# Altium PCB LimeSDR-Mini_2v5_Rounded.PcbDoc (part 1 of 7)
Units mm, origin at the board's own origin, x right, y up, seen from the top; angles counter-clockwise.
Board outline 69 x 31.37 mm, 8 copper layers (Top, L2, L3, L4, L5, L6, L7, Bottom), stack 1.555 mm thick; 439 components, 294 nets, 1986 pads, 831 vias.
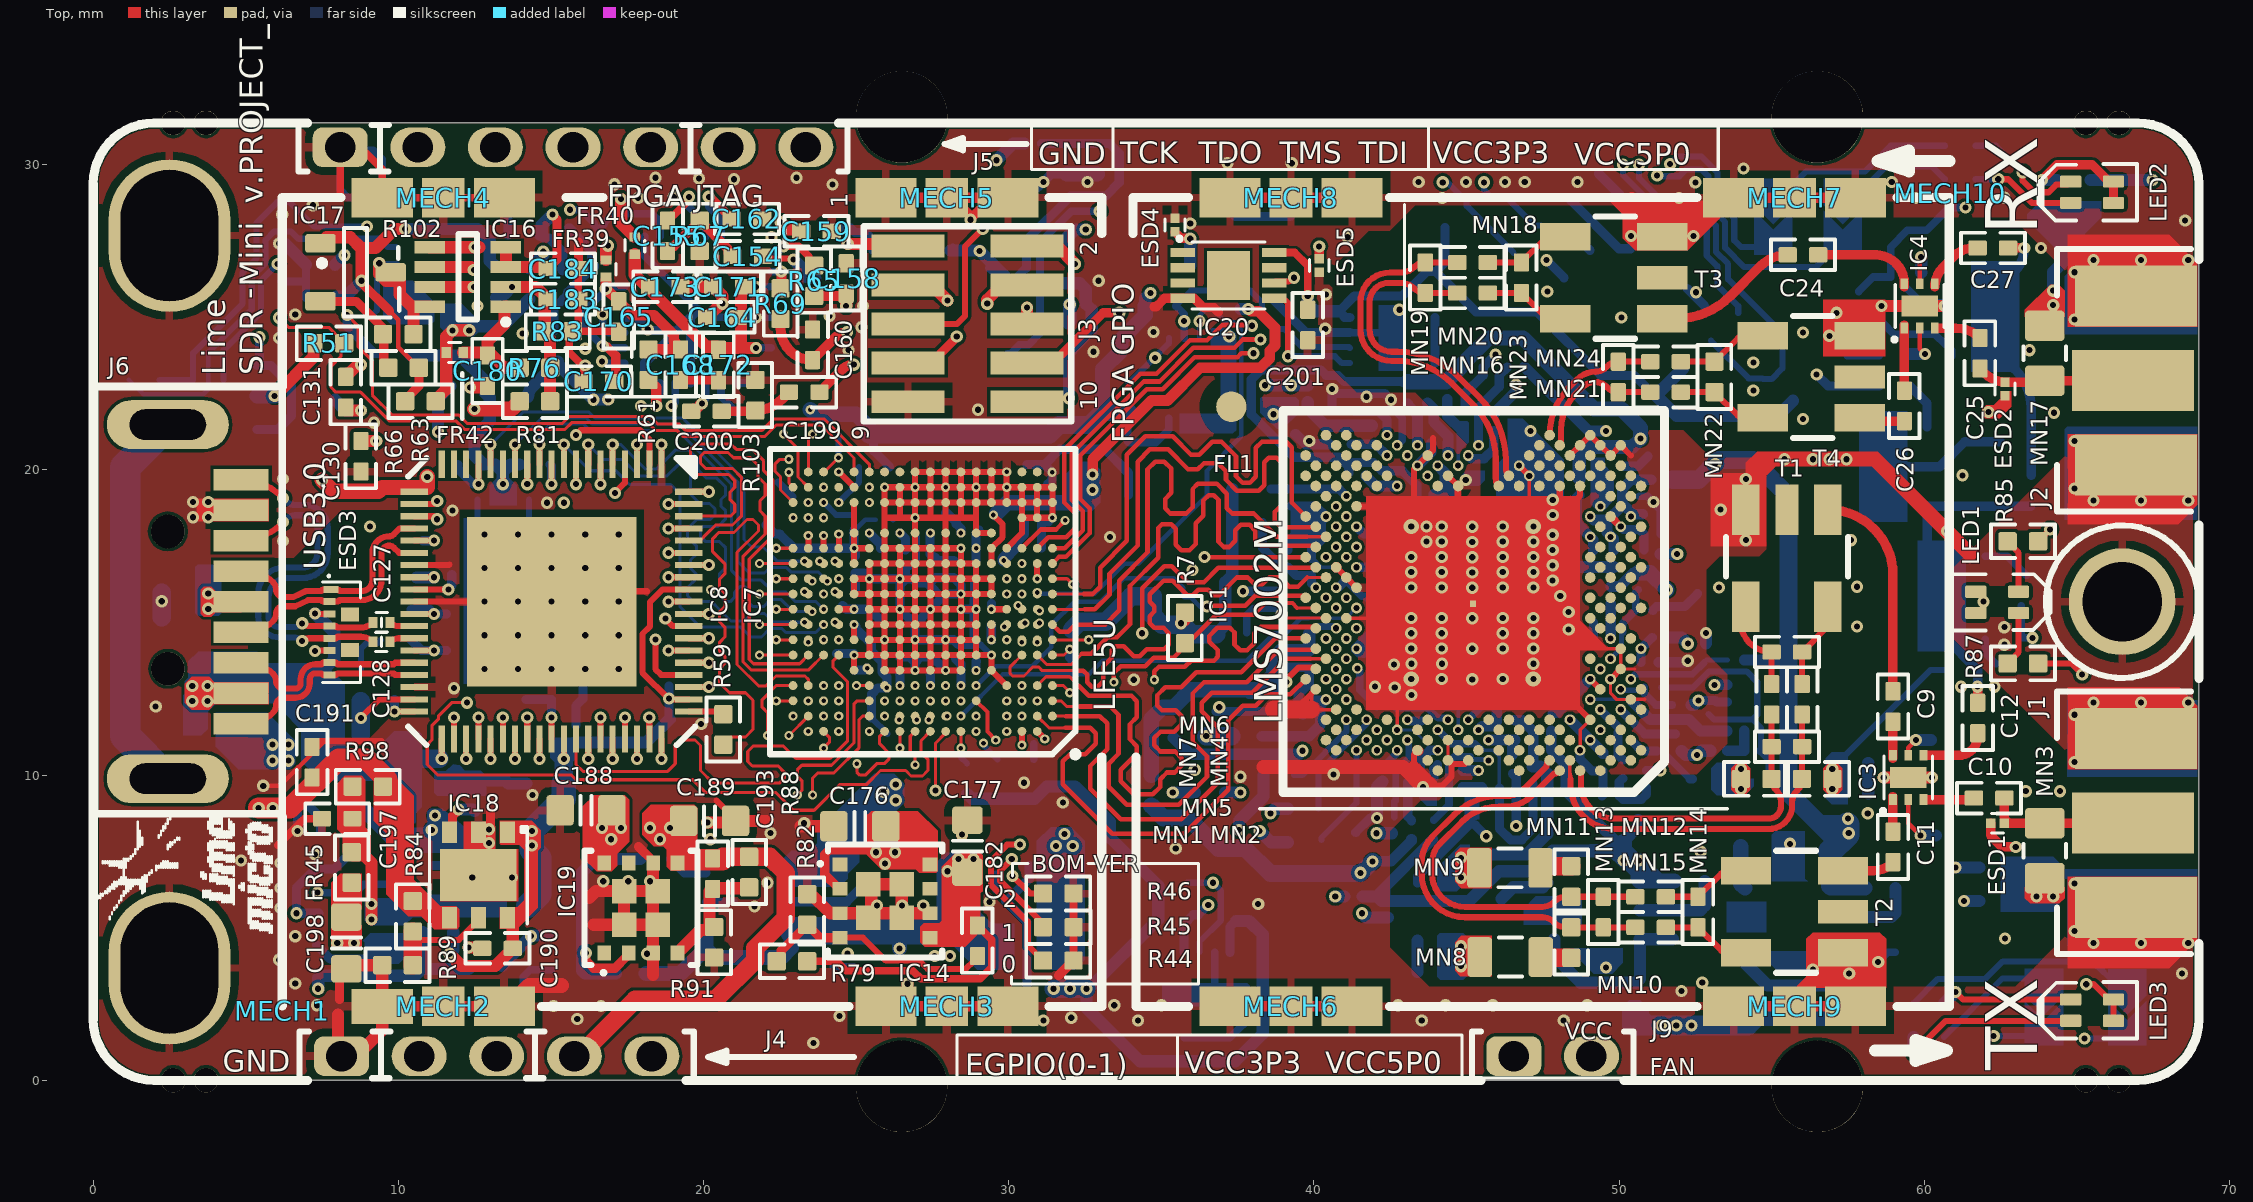
[diagram p0: Top view]
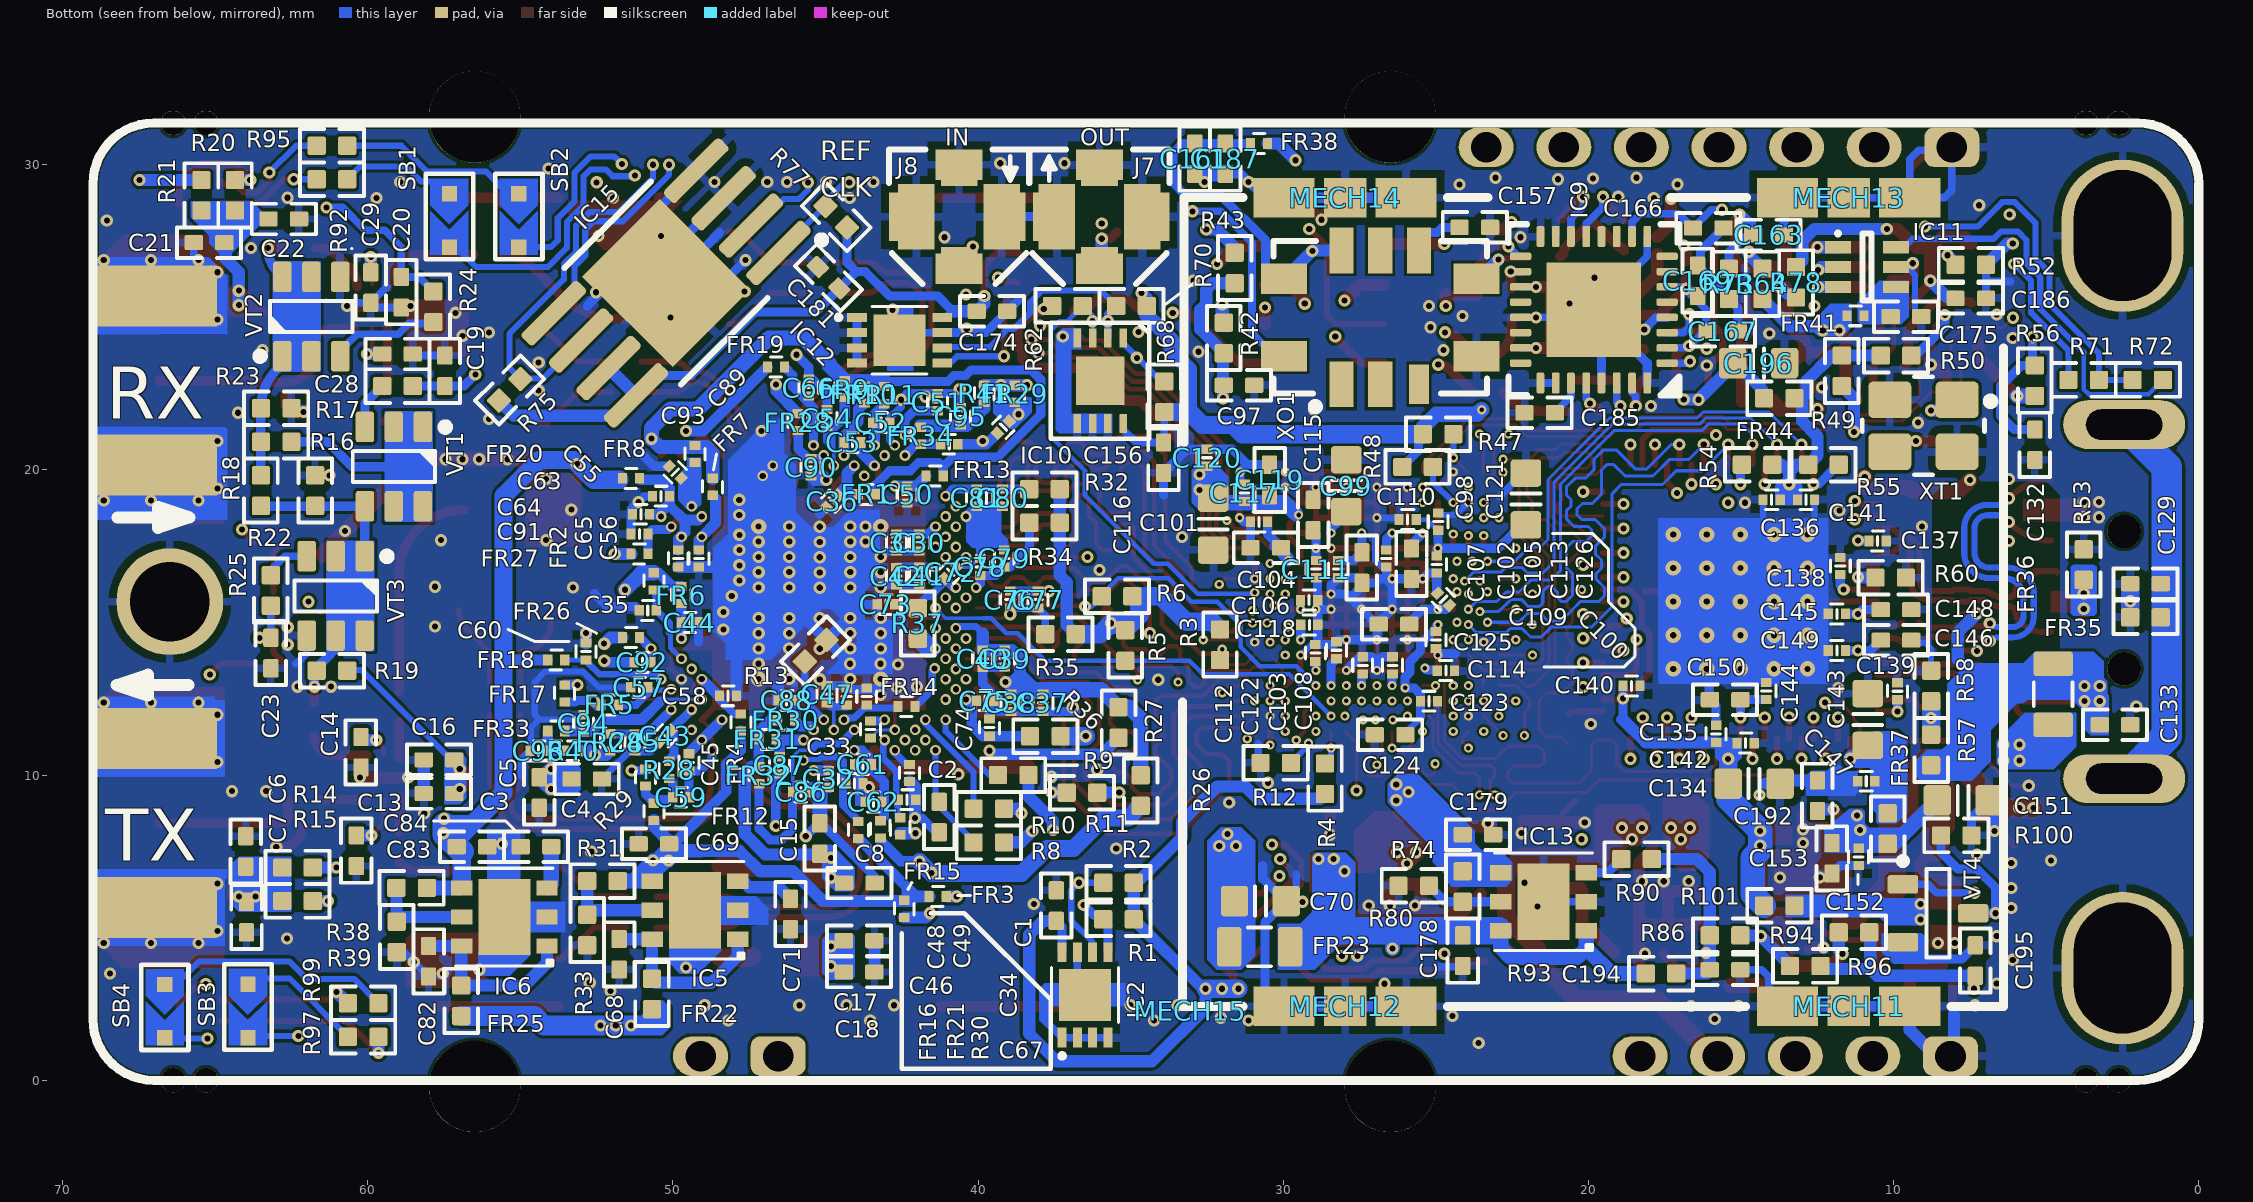
[diagram p1: Bottom view, seen from below]
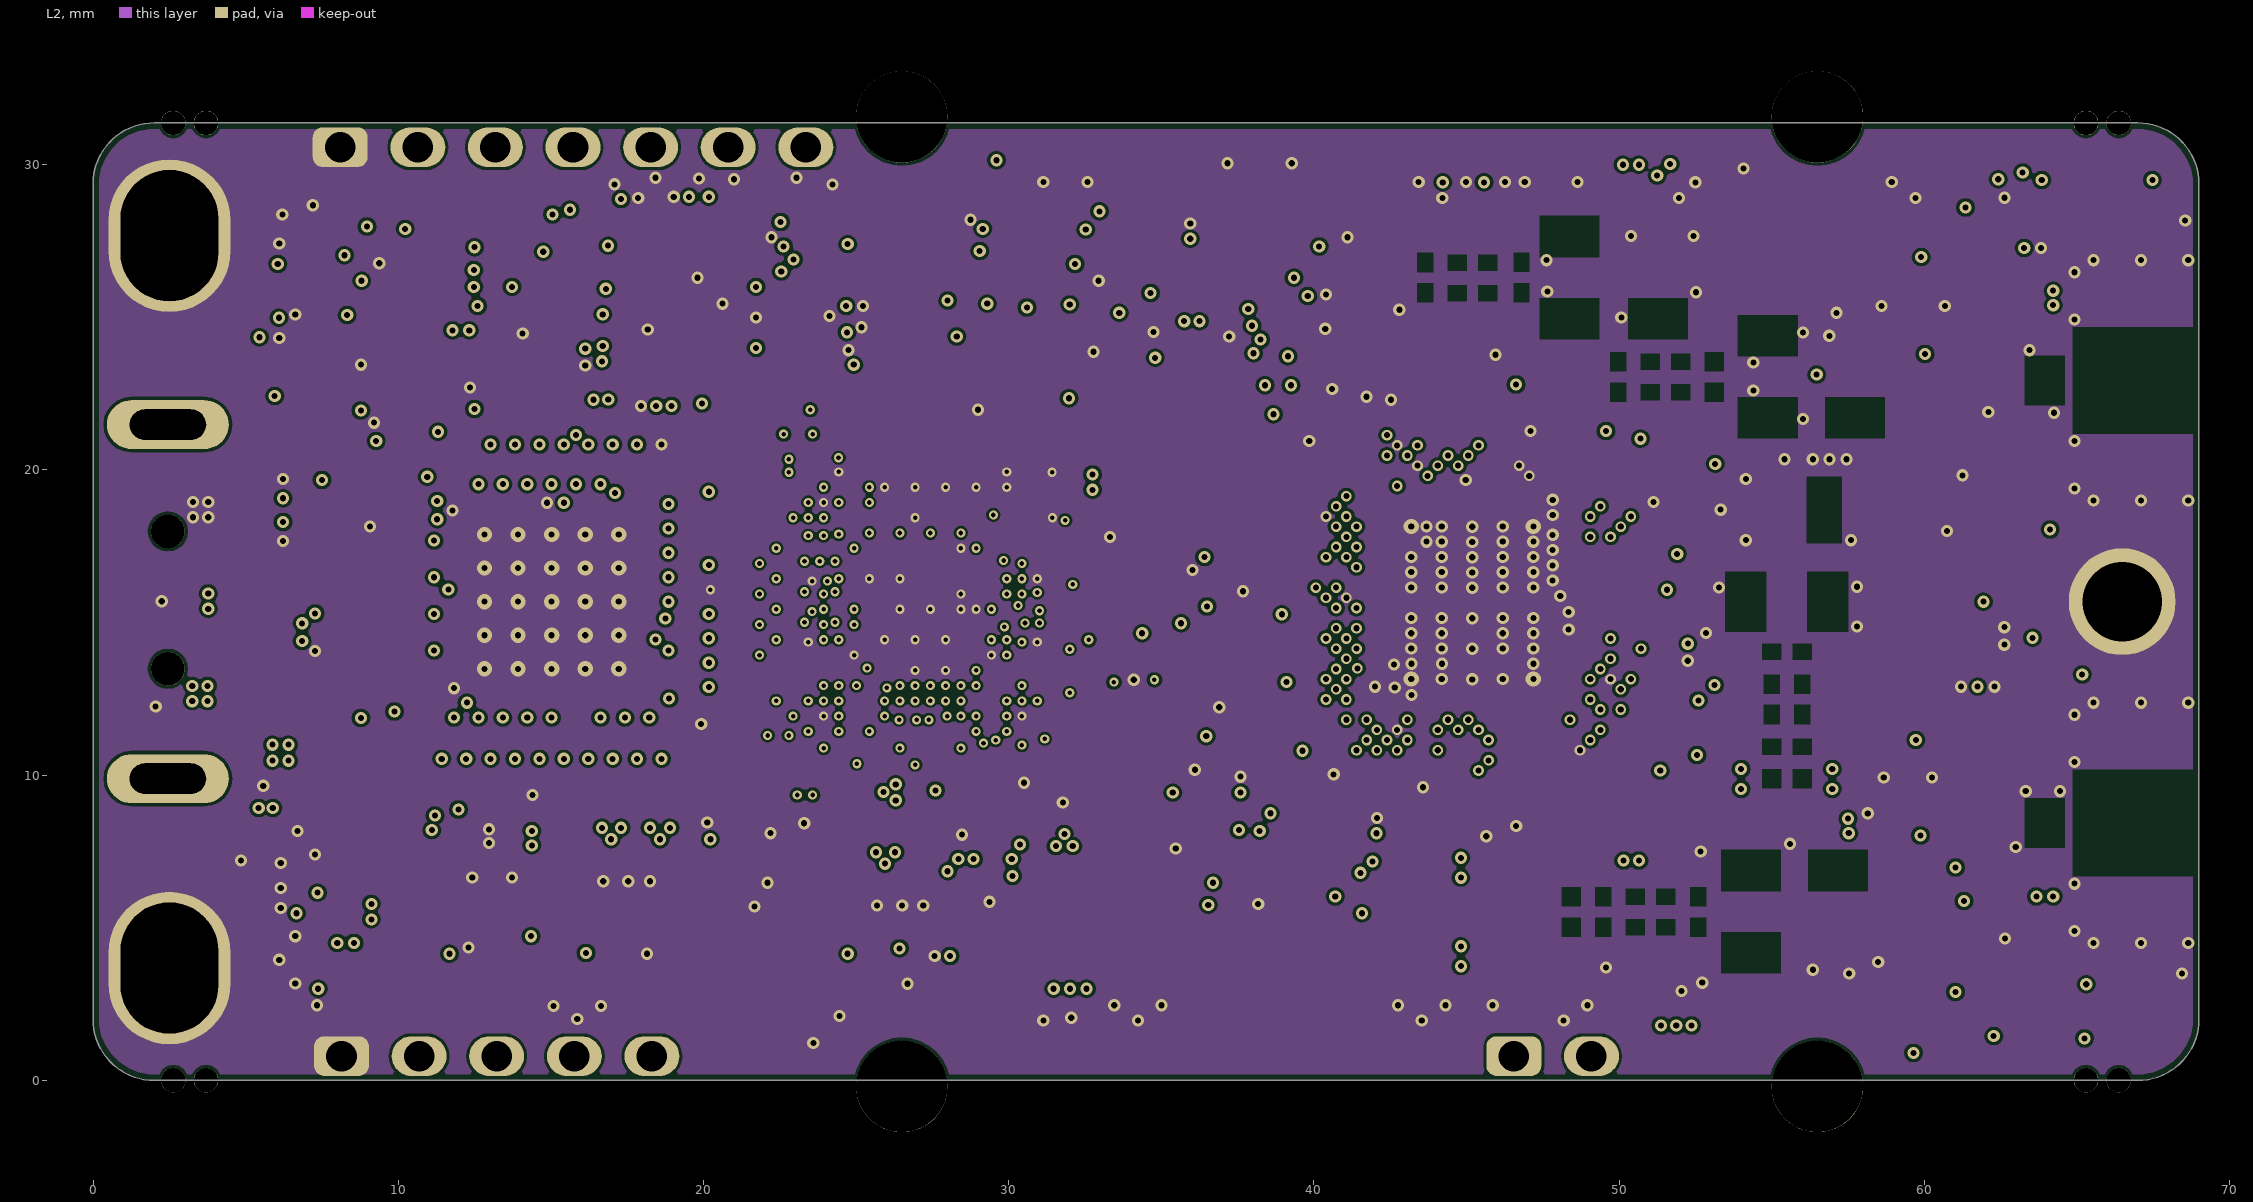
[diagram p2: L2]
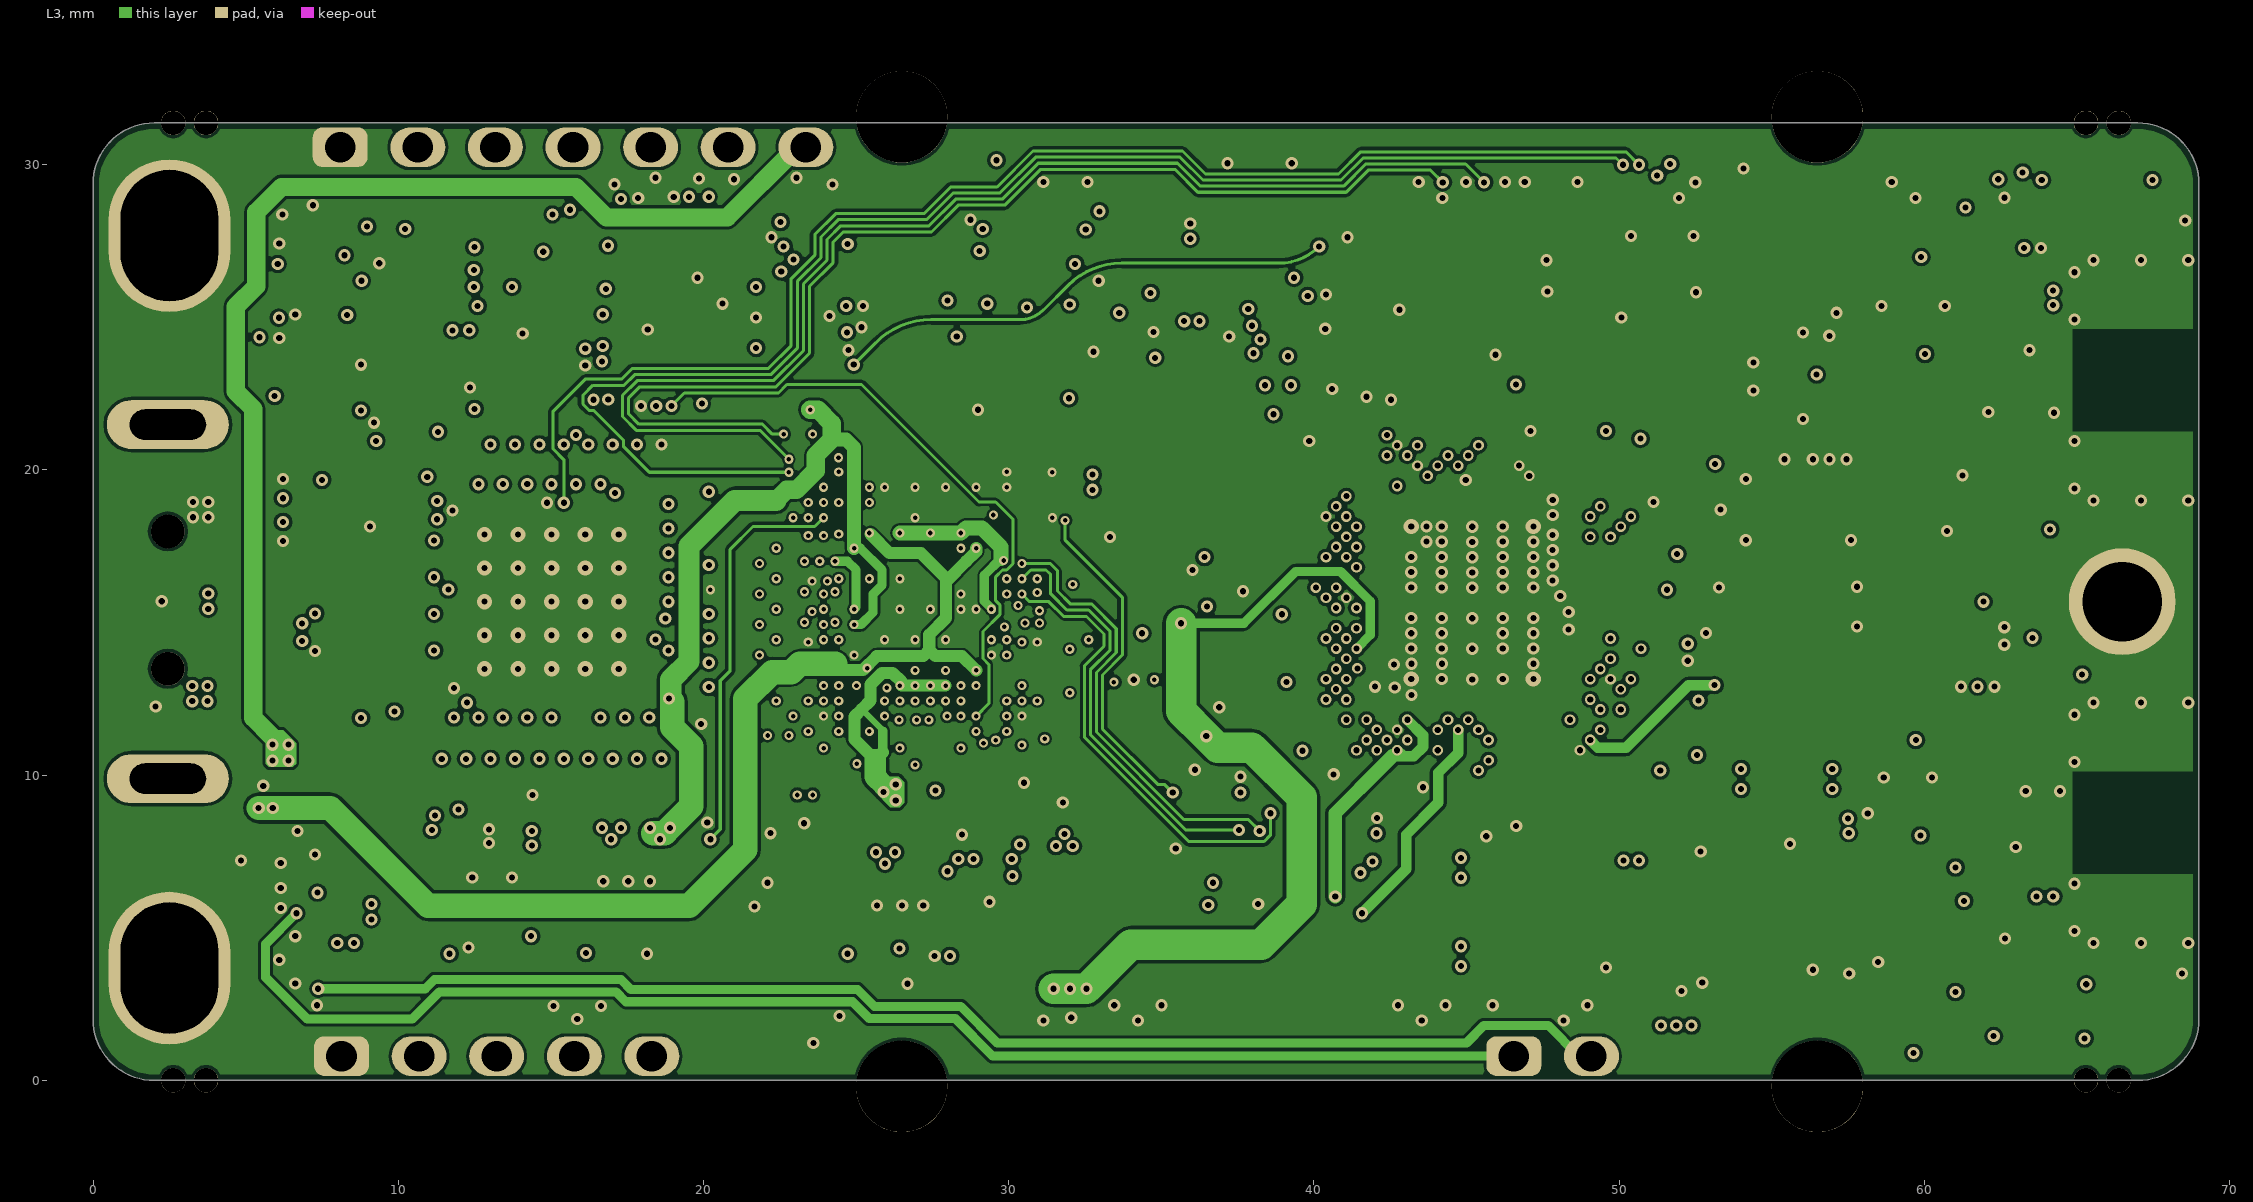
[diagram p3: L3]
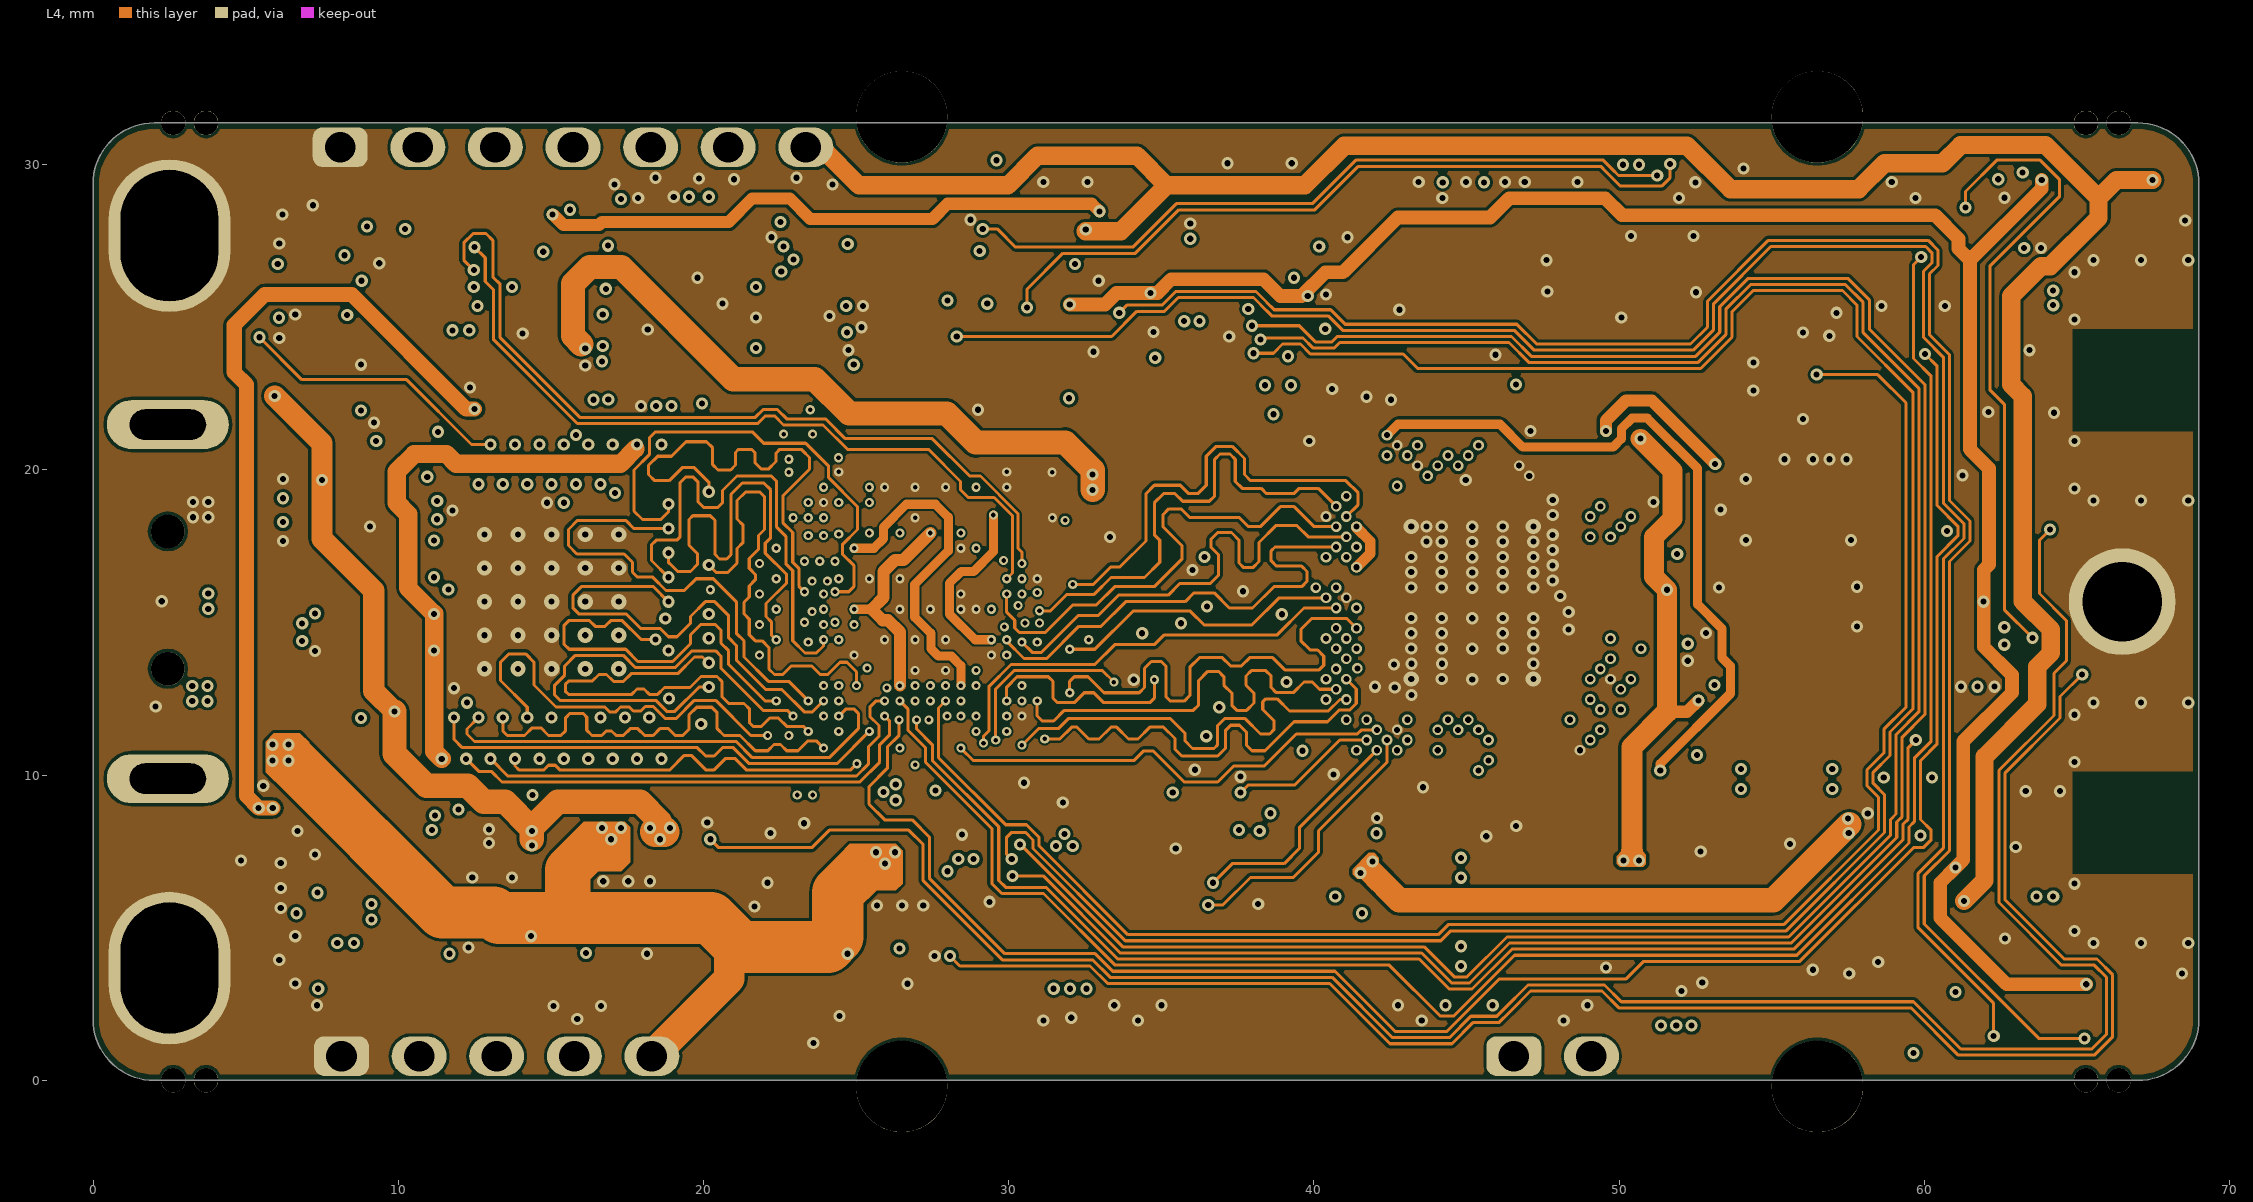
[diagram p4: L4]
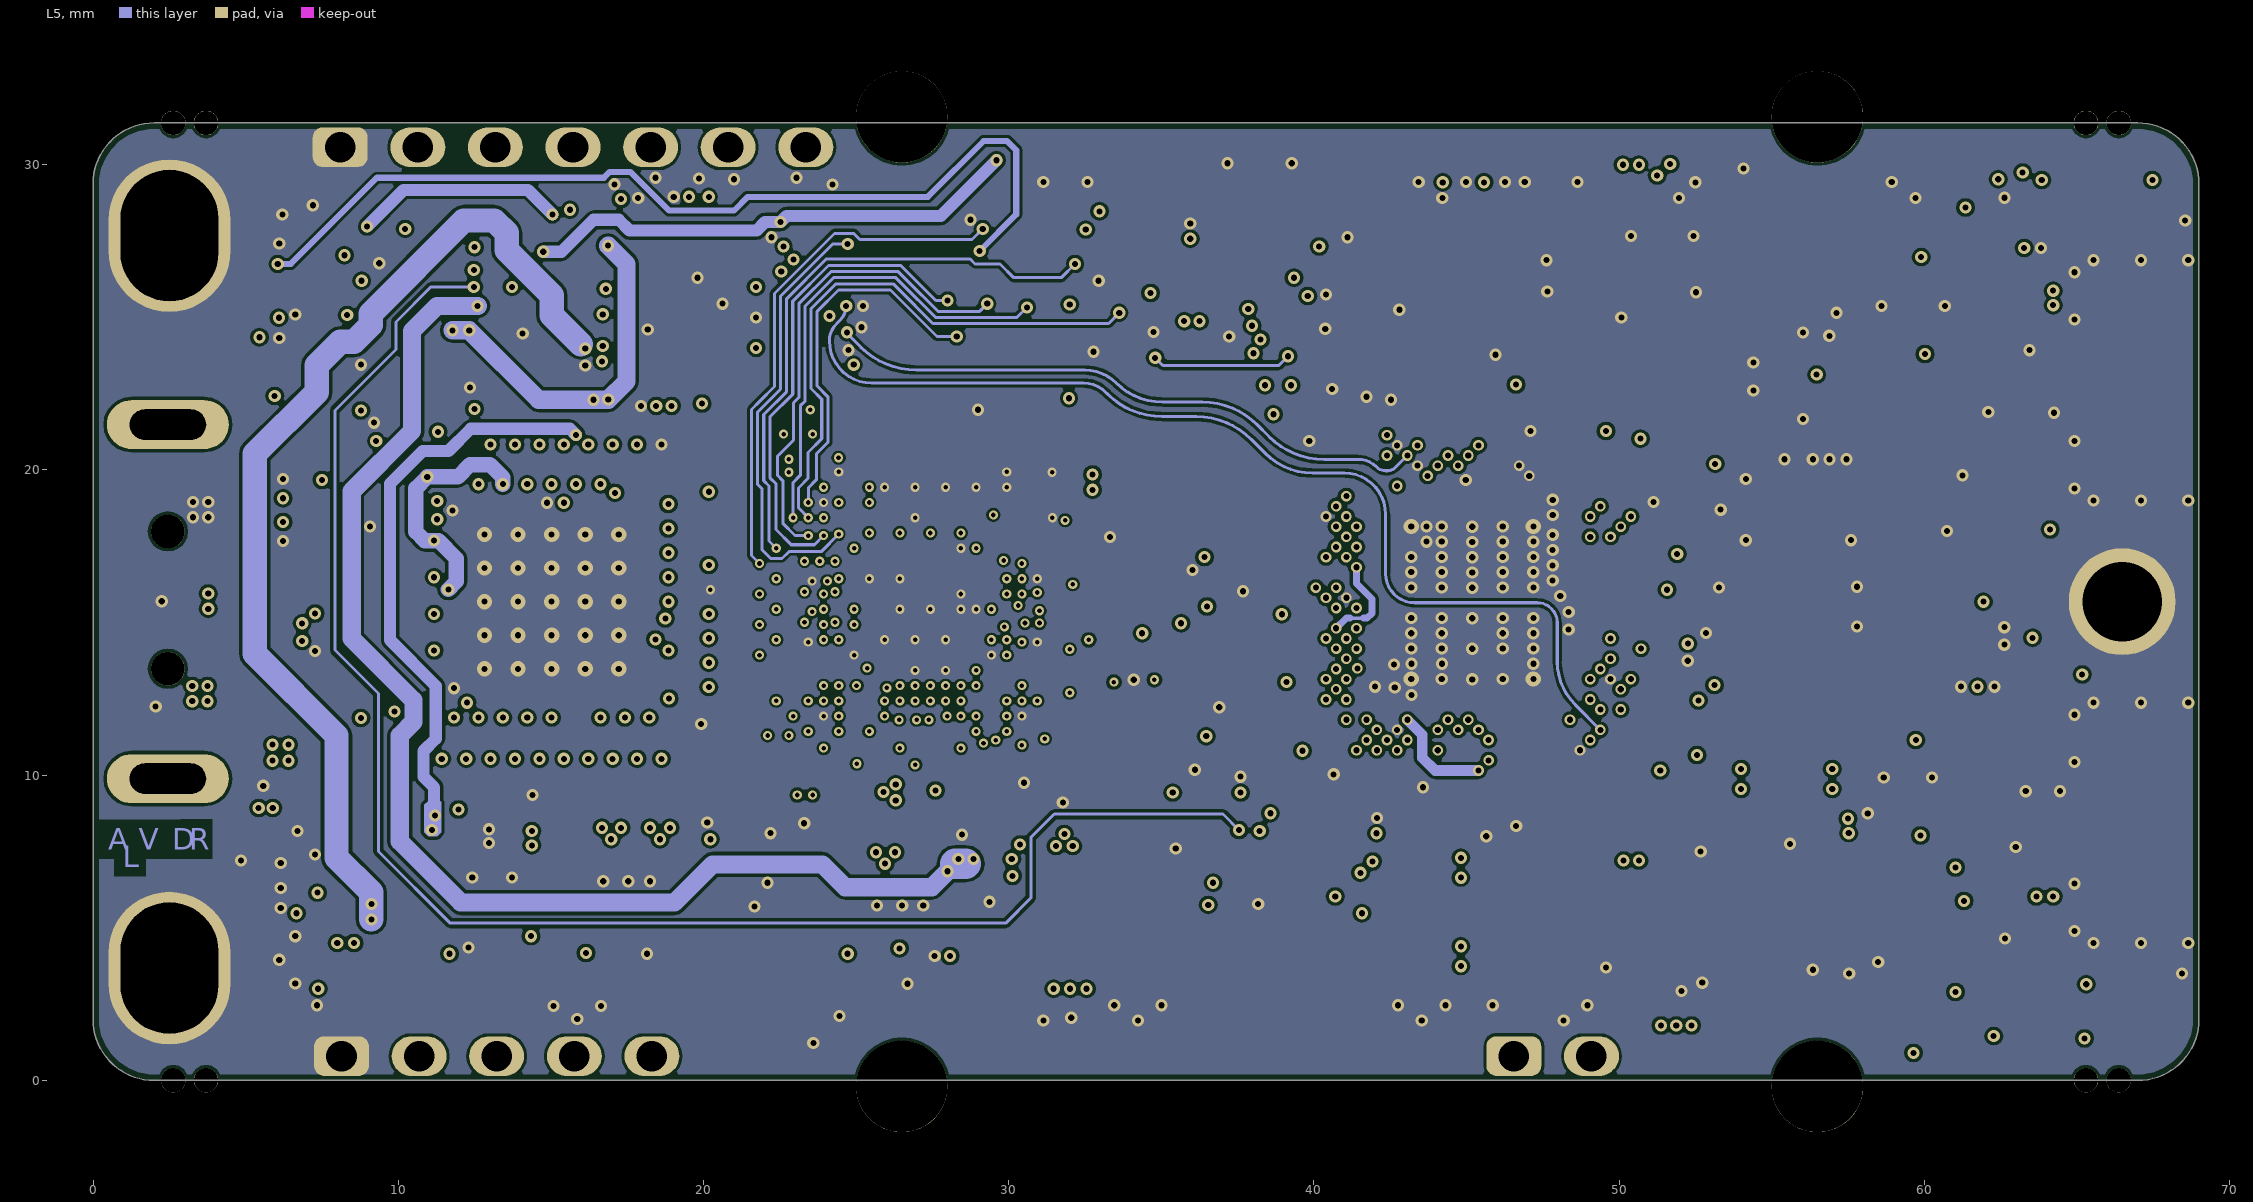
[diagram p5: L5]
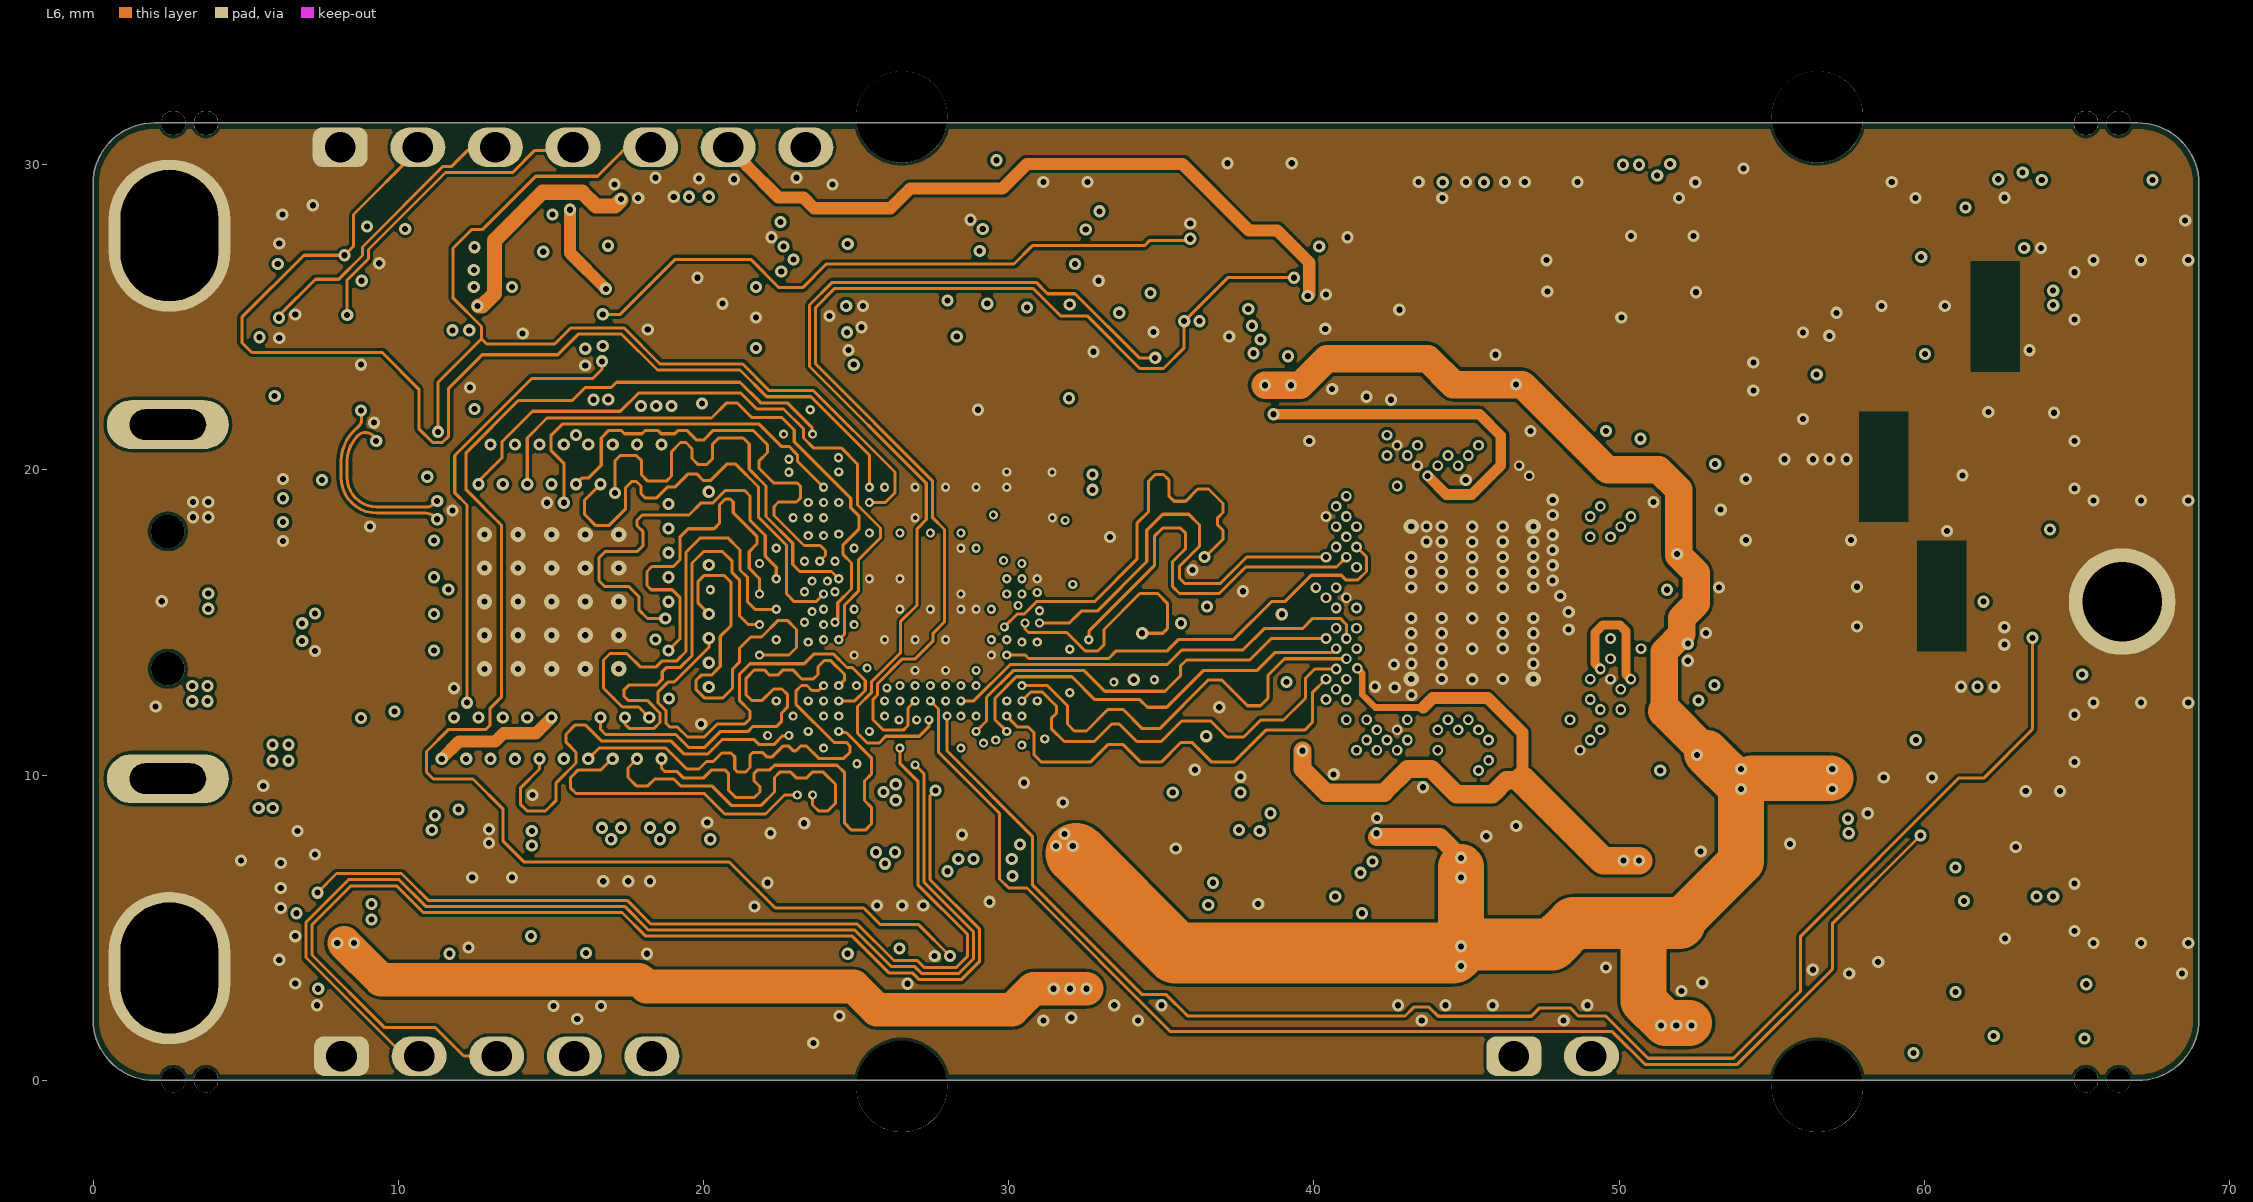
[diagram p6: L6]
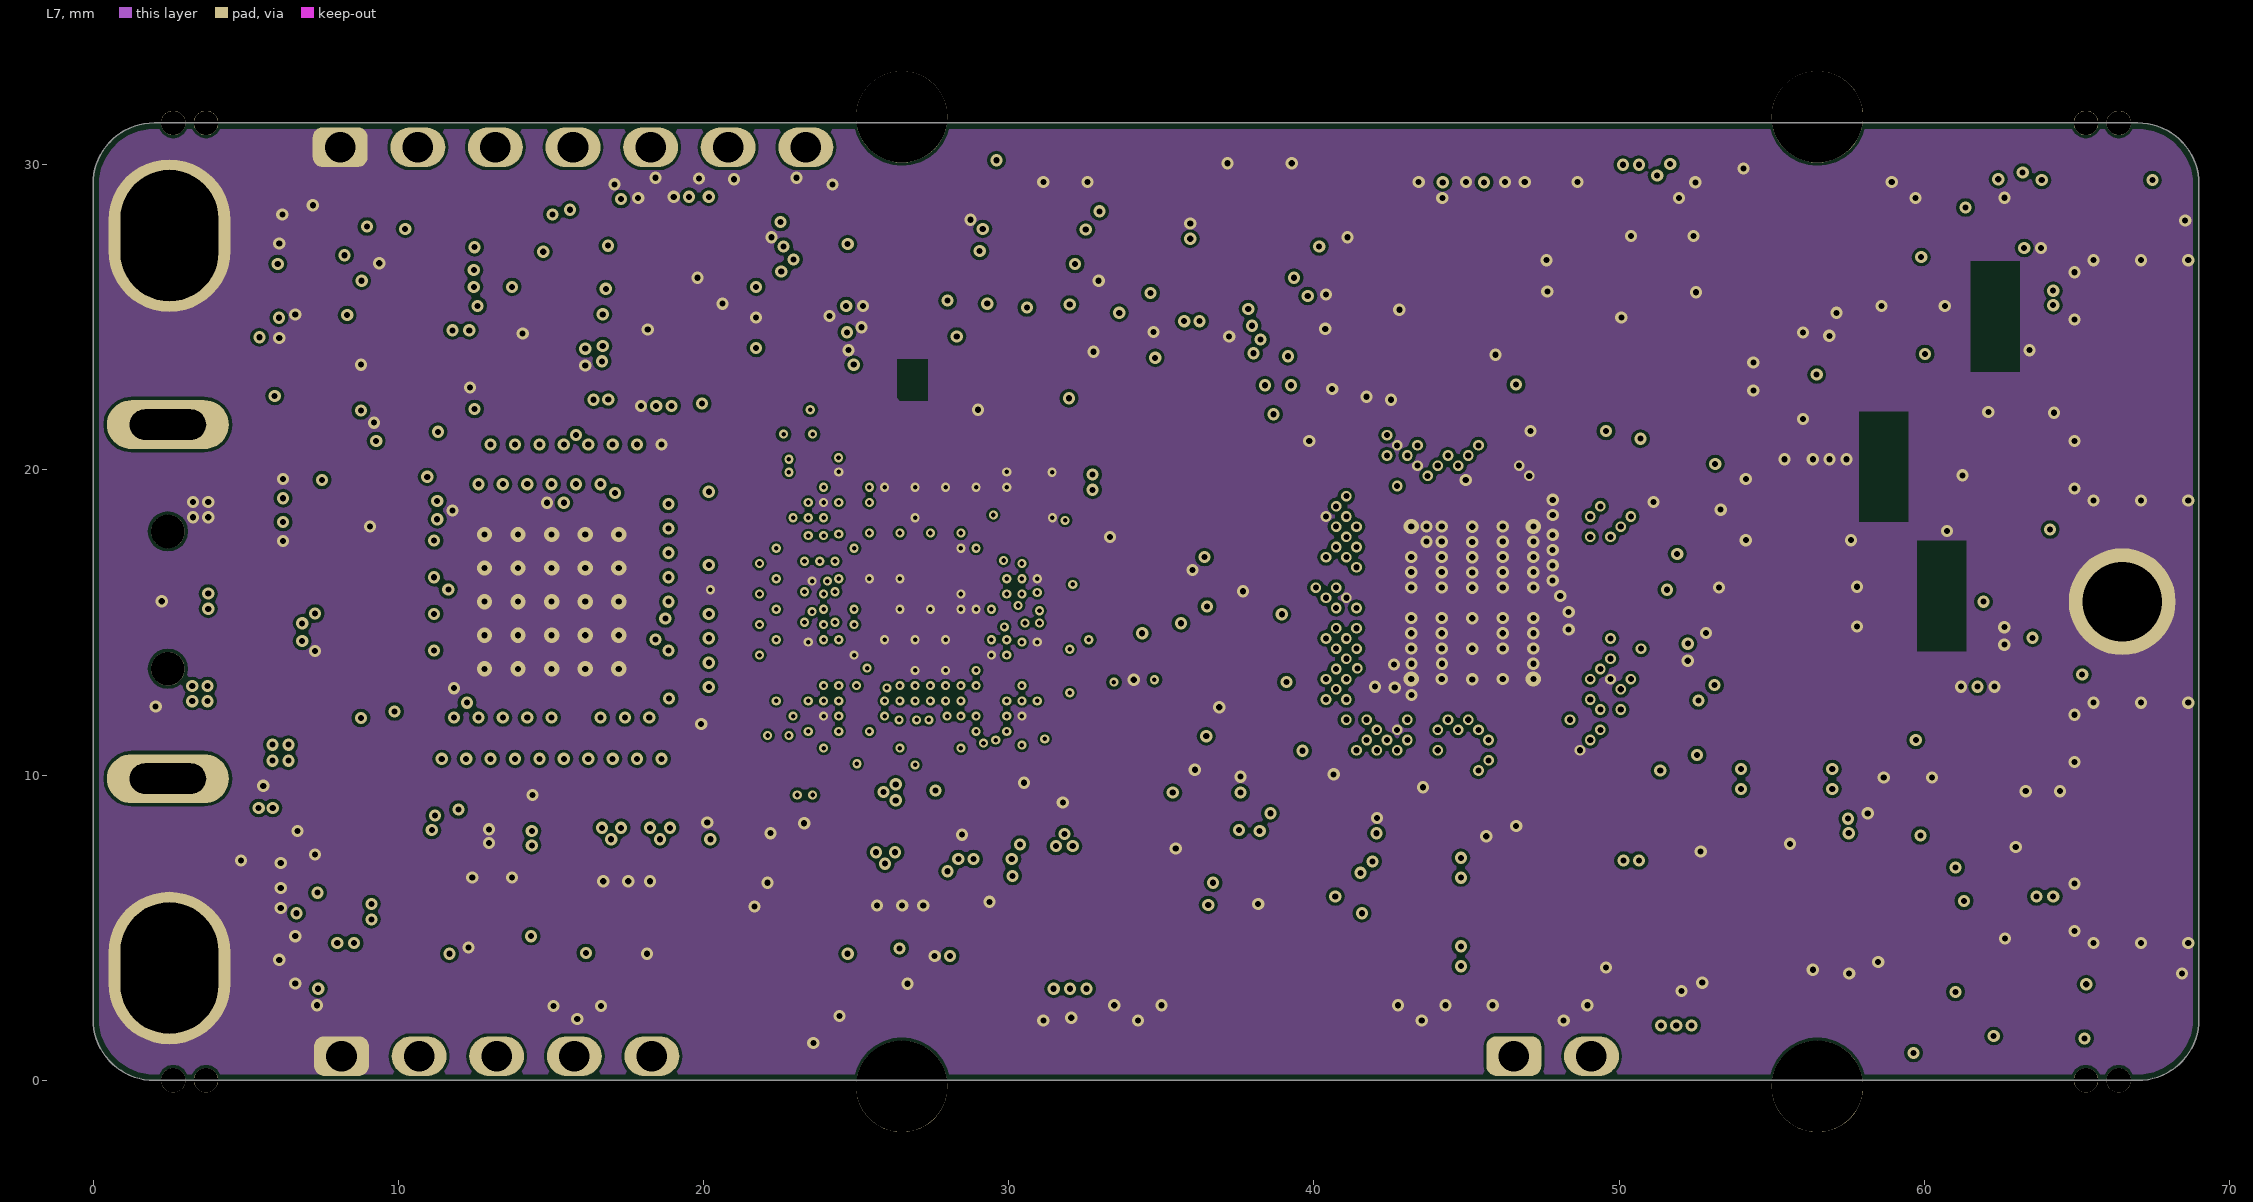
[diagram p7: L7]

## Layer stack, top to bottom
TopSolder: solder mask 0.0102, Solder Resist, Dk 3.5
Top: signal copper 0.0178
Dielectric1: core 0.17, FR-4, Dk 4.8
L2: signal copper 0.0356
Dielectric2: prepreg 0.3, FR-4, Dk 4.2
L3: signal copper 0.03
Dielectric3: core 0.2, FR-4, Dk 4.2
L4: signal copper 0.034
Dielectric 4: prepreg 0.2, Dk 4.2
L5: signal copper 0.03
Dielectric 10: core 0.09, Dk 4.2
L6: signal copper 0.03
Dielectric 11: prepreg 0.2, Dk 4.2
L7: signal copper 0.03
Dielectric 8: core 0.17, Dk 4.2
Bottom: signal copper 0.0178
BottomSolder: solder mask 0.0102, Solder Resist, Dk 3.5

## Board outline
0,2 0,29.37 cw(c2,29.37) 2,31.37 67,31.37 cw(c67,29.37) 69,29.37 69,2 cw(c67,2) 67,0 2,0 cw(c2,2)

## Design rules (kind name [scope] priority, off if disabled: settings)
BoardOutlineClearance [All] p1: gap=0.2 ignorepadtopadclearanceinfootprint=FALSE
Clearance Clearance_FPGA_fanout [WithinRoom('FPGA_fanout')] p1: gap=0.076 ignorepadtopadclearanceinfootprint=FALSE
Clearance [All] p2: gap=0.1 ignorepadtopadclearanceinfootprint=FALSE
ComponentClearance ComponentClearance_LNA_BYP [InComponent('R28') or InComponent('C22') or InComponent('R29') or InComponent('C20') vs InComponent('R28') or InComponent('C22') or InComponent('R29') or InComponent('C20')] p1: gap=-1 collisioncheckmode=3 verticalgap=2540 showdistances=FALSE
ComponentClearance ComponentClearance_EEPROM [InComponent('IC11') or InComponent('IC11A') vs InComponent('IC11') or InComponent('IC11A')] p2: gap=-1 collisioncheckmode=3 verticalgap=2540 showdistances=FALSE
ComponentClearance ComponentClearance_CLK_RES [InComponent('R63') or InComponent('R66') vs InComponent('R63') or InComponent('R66')] p3: gap=-1 collisioncheckmode=3 verticalgap=2540 showdistances=FALSE
ComponentClearance ComponentClearance_RF_SHIELD [InComponent('MECH*') or InComponent('J3')] p4: gap=-10 collisioncheckmode=3 verticalgap=2540 showdistances=FALSE
ComponentClearance [All] p5: gap=0.01 collisioncheckmode=3 verticalgap=0.254 showdistances=FALSE
DiffPairsRouting DiffPairsRouting_USB3 [InNetClass('FX3_DATA')] p1: maxlimit=0.3 minlimit=0.1 mostfreqgap=0.14 toplayer_minwidth=0.2 toplayer_maxwidth=0.2 toplayer_prefwidth=0.2 midlayer1_minwidth=0.2 midlayer1_maxwidth=0.2 midlayer1_prefwidth=0.2 midlayer2_minwidth=0.2 midlayer2_maxwidth=0.2 midlayer2_prefwidth=0.2 midlayer3_minwidth=0.2 midlayer3_maxwidth=0.2 midlayer3_prefwidth=0.2 midlayer4_minwidth=0.2 midlayer4_maxwidth=0.2 midlayer4_prefwidth=0.2 midlayer7_minwidth=0.2 midlayer7_maxwidth=0.2 midlayer7_prefwidth=0.2 midlayer9_minwidth=0.2 midlayer9_maxwidth=0.2 midlayer9_prefwidth=0.2 bottomlayer_minwidth=0.2 bottomlayer_maxwidth=0.2 bottomlayer_prefwidth=0.2 maxuncoupledlength=12.7
DiffPairsRouting DiffPairsRouting_USB3_XTAL [InNet('FX3_XTAL_N') or InNet('FX3_XTAL_P')] p2: maxlimit=0.2 minlimit=0.1 mostfreqgap=0.1 toplayer_minwidth=0.1 toplayer_maxwidth=0.4 toplayer_prefwidth=0.1 midlayer1_minwidth=0.1 midlayer1_maxwidth=0.4 midlayer1_prefwidth=0.1 midlayer2_minwidth=0.1 midlayer2_maxwidth=0.4 midlayer2_prefwidth=0.1 midlayer3_minwidth=0.1 midlayer3_maxwidth=0.4 midlayer3_prefwidth=0.1 midlayer4_minwidth=0.1 midlayer4_maxwidth=0.4 midlayer4_prefwidth=0.1 midlayer7_minwidth=0.1 midlayer7_maxwidth=0.4 midlayer7_prefwidth=0.1 midlayer9_minwidth=0.1 midlayer9_maxwidth=0.4 midlayer9_prefwidth=0.1 bottomlayer_minwidth=0.1 bottomlayer_maxwidth=0.4 bottomlayer_prefwidth=0.1 maxuncoupledlength=0.2
DiffPairsRouting DiffPairsRouting_TX_RF [InNetClass('TX_RF')] p3: maxlimit=0.14 minlimit=0.14 mostfreqgap=0.14 toplayer_minwidth=0.1 toplayer_maxwidth=0.2 toplayer_prefwidth=0.2 midlayer1_minwidth=0.1 midlayer1_maxwidth=0.2 midlayer1_prefwidth=0.2 midlayer2_minwidth=0.1 midlayer2_maxwidth=0.2 midlayer2_prefwidth=0.2 midlayer3_minwidth=0.1 midlayer3_maxwidth=0.2 midlayer3_prefwidth=0.2 midlayer4_minwidth=0.1 midlayer4_maxwidth=0.2 midlayer4_prefwidth=0.2 midlayer7_minwidth=0.1 midlayer7_maxwidth=0.2 midlayer7_prefwidth=0.2 midlayer9_minwidth=0.1 midlayer9_maxwidth=0.2 midlayer9_prefwidth=0.2 bottomlayer_minwidth=0.1 bottomlayer_maxwidth=0.2 bottomlayer_prefwidth=0.2 maxuncoupledlength=0.2
DiffPairsRouting DiffPairsRouting_RX_RF [InNetClass('RX_RF')] p4: maxlimit=0.3 minlimit=0.1 mostfreqgap=0.14 toplayer_minwidth=0.1 toplayer_maxwidth=0.3 toplayer_prefwidth=0.2 midlayer1_minwidth=0.1 midlayer1_maxwidth=0.3 midlayer1_prefwidth=0.2 midlayer2_minwidth=0.1 midlayer2_maxwidth=0.3 midlayer2_prefwidth=0.2 midlayer3_minwidth=0.1 midlayer3_maxwidth=0.3 midlayer3_prefwidth=0.2 midlayer4_minwidth=0.1 midlayer4_maxwidth=0.3 midlayer4_prefwidth=0.2 midlayer7_minwidth=0.1 midlayer7_maxwidth=0.3 midlayer7_prefwidth=0.2 midlayer9_minwidth=0.1 midlayer9_maxwidth=0.3 midlayer9_prefwidth=0.2 bottomlayer_minwidth=0.1 bottomlayer_maxwidth=0.3 bottomlayer_prefwidth=0.2 maxuncoupledlength=0.2
DiffPairsRouting [All] p5: maxlimit=0.3 minlimit=0.1 mostfreqgap=0.1 toplayer_minwidth=0.1 toplayer_maxwidth=0.5 toplayer_prefwidth=0.2 midlayer1_minwidth=0.1 midlayer1_maxwidth=0.5 midlayer1_prefwidth=0.2 midlayer2_minwidth=0.1 midlayer2_maxwidth=0.5 midlayer2_prefwidth=0.2 midlayer3_minwidth=0.1 midlayer3_maxwidth=0.5 midlayer3_prefwidth=0.2 midlayer4_minwidth=0.1 midlayer4_maxwidth=0.5 midlayer4_prefwidth=0.2 midlayer7_minwidth=0.1 midlayer7_maxwidth=0.5 midlayer7_prefwidth=0.2 midlayer9_minwidth=0.1 midlayer9_maxwidth=0.5 midlayer9_prefwidth=0.2 bottomlayer_minwidth=0.1 bottomlayer_maxwidth=0.5 bottomlayer_prefwidth=0.2 maxuncoupledlength=12.7
FabricationTestPointUsage TestPointUsage [All] p1: valid=0 allowmultiple=FALSE
FabricationTestpoint Testpoint [All] p1: side=3 testpointundercomponent=TRUE minsize=1.016 maxsize=2.54 preferedsize=1.524 minholesize=0.508 maxholesize=1.016 preferedholesize=0.813 testpointgrid=0.025 allowsidetop=TRUE allowsidebottom=TRUE usegrid=TRUE gridtolerance=0
HoleSize [All] p1: absolutevalues=TRUE maxlimit=10 minlimit=0.15 maxpercent=80.000 minpercent=20.000
HoleToHoleClearance [All] p1: gap=0.15 allowstackedmicrovias=TRUE
MatchedLengths MatchedLengths_FT_FIFO [InNetClass('FT_FIFO')] p1: tolerance=5 checknetsindiffpair=FALSE checkdiffpairvsdiffpair=TRUE checkxsignals=TRUE checkothers=TRUE
MatchedLengths MatchedLengths_LMS_PORT1 [InNetClass('LMS_PORT1')] p2: tolerance=7 checknetsindiffpair=FALSE checkdiffpairvsdiffpair=TRUE checkxsignals=TRUE checkothers=TRUE // tolerance increased due to MCLK being longer
MatchedLengths MatchedLengths_LMS_PORT2 [InNetClass('LMS_PORT2')] p3: tolerance=7.5 checknetsindiffpair=FALSE checkdiffpairvsdiffpair=TRUE checkxsignals=TRUE checkothers=TRUE // tolerance increased due to MCLK being longer
MinimumSolderMaskSliver [All] p1: minsoldermaskwidth=0.05
PlaneClearance [All] p1: clearance=0
PolygonConnect PolygonConnect_VCC3P3 [InNetClass('VCC3P3')] p1: connectstyle=Direct reliefconductorwidth=0.254 reliefentries=4 polygonreliefangle="90 Angle" airgapwidth=0.254
PolygonConnect PolygonConnect_GND_VIA [InNet('GND') and isvia] p2: connectstyle=Direct reliefconductorwidth=0.254 reliefentries=4 polygonreliefangle="90 Angle" airgapwidth=0.254
PolygonConnect PolygonConnect_GND_MMCX [HasFootprint('MMCX_UFL_CONN_V3_M') and IsPad and InNet('GND')] p3: connectstyle=Relief reliefconductorwidth=0.7 reliefentries=4 polygonreliefangle="90 Angle" airgapwidth=0.254
PolygonConnect PolygonConnect_GND [InNet('GND') and (OnTopLayer or OnBottomLayer)] p4: connectstyle=Relief reliefconductorwidth=0.254 reliefentries=4 polygonreliefangle="90 Angle" airgapwidth=0.254
PolygonConnect PolygonConnect_GND_inner [InNet('GND') and not (OnTopLayer or OnBottomLayer)] p5: connectstyle=Direct reliefconductorwidth=0.254 reliefentries=4 polygonreliefangle="90 Angle" airgapwidth=0.254
PolygonConnect PolygonConnect_USB_GND [InNet('USB_GND')] p6: connectstyle=Direct reliefconductorwidth=0.254 reliefentries=4 polygonreliefangle="90 Angle" airgapwidth=0.254
PolygonConnect PolygonConnect_FX3_GND [InNet('FX3_GND')] p7: connectstyle=Direct reliefconductorwidth=0.254 reliefentries=4 polygonreliefangle="90 Angle" airgapwidth=0.254
PolygonConnect PolygonConnect_VCC1P8 [InNet('VCC1P8')] p8: connectstyle=Direct reliefconductorwidth=0.254 reliefentries=4 polygonreliefangle="90 Angle" airgapwidth=0.254
PolygonConnect PolygonConnect_VCC1P8_LMS [InNet('VCC1P8_LMS')] p9: connectstyle=Direct reliefconductorwidth=0.254 reliefentries=4 polygonreliefangle="90 Angle" airgapwidth=0.254
PolygonConnect PolygonConnect_VCC1P8_FX3 [InNet('VCC1P8_FX3')] p10: connectstyle=Direct reliefconductorwidth=0.254 reliefentries=4 polygonreliefangle="90 Angle" airgapwidth=0.254
PolygonConnect PolygonConnect_VDIO_LMS [InNet('VDIO_LMS')] p11: connectstyle=Direct reliefconductorwidth=0.254 reliefentries=4 polygonreliefangle="90 Angle" airgapwidth=0.254
PolygonConnect PolygonConnect_VDIO_LMS_FPGA [InNet('VDIO_LMS_FPGA')] p12: connectstyle=Direct reliefconductorwidth=0.254 reliefentries=4 polygonreliefangle="90 Angle" airgapwidth=0.254
PolygonConnect PolygonConnect_VCC5P0_USB [InNetClass('VCC5P0_USB')] p13: connectstyle=Direct reliefconductorwidth=0.254 reliefentries=4 polygonreliefangle="90 Angle" airgapwidth=0.254
PolygonConnect [All] p14: connectstyle=Relief reliefconductorwidth=0.254 reliefentries=4 polygonreliefangle="90 Angle" airgapwidth=0.254
RoomDefinition FPGA_fanout [False] p1: confinementstyle=ConfineIn formatcopy=TRUE lockcomponents=FALSE outline 21.725,21.15 32.625,21.15 32.625,10.3 21.725,10.3
RoutingVias [All] p1: holewidth=0.2 width=0.4 viastyle="Through Hole" minholewidth=0.15 minwidth=0.3 maxholewidth=4.5 maxwidth=5
SilkToSilkClearance [All] p1: silktosilkclearance=0.1
SilkToSolderMaskClearance SilkscreenOverComponentPads [IsPad] p1: minsilkscreentomaskgap=0.1 clearancetoexposedcopper=TRUE
SolderMaskExpansion [All] p1: expansion=0.05
Width Width_FPGA_fanout [WithinRoom('FPGA_fanout')] p1: maxlimit=5 minlimit=0.076 preferedwidth=0.127
Width Width_ClumsyConnection [All] p2: maxlimit=7 minlimit=0.1 preferedwidth=0.2 checkconnectedcopper=TRUE
Width [All] p3: maxlimit=5 minlimit=0.1 preferedwidth=0.2
20 further rules are at their usual default settings.

## Classes and differential pairs
net class VCC5P0: VCC5P0
net class VCC1P8: VCC1P8
net class VDIO_LMS_FPGA: VDIO_LMS_FPGA
net class VDIO_LMS: VDIO_LMS
net class FT_FIFO: FT_BE0 FT_BE1 FT_BE2 FT_BE3 FT_CLK FT_D0 FT_D1 FT_D2 FT_D3 FT_D4 FT_D5 FT_D6 FT_D7 FT_D8 FT_D9 FT_D10 FT_D11 FT_D12 FT_D13 FT_D14 FT_D15 FT_D16 FT_D17 FT_D18 FT_D19 FT_D20 FT_D21 FT_D22 FT_D23 FT_D24 FT_D25 FT_D26 FT_D27 FT_D28 FT_D29 FT_D30 FT_D31 FT_OEN FT_TXEN
net class VCC3P3_CLK: VCC3P3_CLK
net class VCC1P8_LMS: VCC1P8_LMS
net class FT_USB: FT_VBUS NetJ6_7 USB_D_N USB_D_P USB_SSRX_N USB_SSRX_P USB_SSTX_N USB_SSTX_P USB_SSTXI_N USB_SSTXI_P
net class FPGA_GPIO: FPGA_GPIO0 FPGA_GPIO1 FPGA_GPIO2 FPGA_GPIO3 FPGA_GPIO4 FPGA_GPIO5 FPGA_GPIO6 FPGA_GPIO7
component class 09_USB3_0_FIFO: C127 C128 C129 C130 C131 C132 C133 C134 C135 C136 C137 C138 C139 C140 C141 C142 C143 C144 C145 C146 C147 C148 C149 C150 C151 C152 C153 ESD3 FR35 FR36 FR37 IC8 J6 R53 R54 R55 R56 R57 R58 R59 R60 XT1
component class 08_FPGA: C97 C98 C99 C100 C101 C102 C103 C104 C105 C106 C107 C108 C109 C110 C111 C112 C113 C114 C115 C116 C117 C118 C119 C120 C121 C122 C123 C124 C125 C126 IC7 J3 J4 J5 R42 R43 R44 R45 R46 R47 R48 R49 R50 R51 R52
net class +1.8V_DIG_LMK: +1.8V_DIG_LMK
net class RF_RX: RX1_H_A_N RX1_H_A_P RX1_H_B_N RX1_H_B_P RX1_W_A_N RX1_W_A_P RX2_W_B_N RX2_W_B_P
net class RF_TX: GND NetMN8_1 NetMN9_1 TX1_1_A_N TX1_1_A_P TX1_1_B_N TX1_1_B_P TX2_1_A_N TX2_1_A_P TX2_1_B_N TX2_1_B_P VCC1P8_LMS
component class 07_LMS7002M_Power: C30 C31 C32 C33 C34 C35 C36 C37 C38 C39 C40 C41 C42 C43 C44 C45 C46 C47 C48 C49 C50 C51 C52 C53 C54 C55 C56 C57 C58 C59 C60 C61 C62 C63 C64 C65 C66 C67 C68 C69 C70 C71 C72 C73 C74 C75 C76 C77 C78 C79 C80 C81 C82 C83 C84 C85 C86 C87 C88 C89 C90 C91 C92 C93 C94 C95 C96 FR1 FR2 FR3 FR4 FR5 FR6 FR7 FR8 FR9 FR10 FR11 FR12 FR13 FR14 FR15 FR16 FR17 FR18 FR19 FR20 FR21 FR22 FR23 FR24 FR25 FR26 FR27 FR28 FR29 FR30 FR31 FR32 FR33 FR34 IC5 IC6 R26 R27 R28 R29 R30 R31 R32 R33 R34 R35 R36 R37 R38 R39 R40 R41
component class 06_LMS7002M_RF: C3 C4 C5 C6 C7 C8 C9 C10 C11 C12 C13 C14 C15 C16 C17 C18 C19 C20 C21 C22 C23 C24 C25 C26 C27 C28 C29 ESD1 ESD2 IC3 IC4 J1 J2 L3 MN1 MN2 MN3 MN4 MN5 MN6 MN7 MN8 MN9 MN10 MN11 MN12 MN13 MN14 MN15 MN16 MN17 MN18 MN19 MN20 MN21 MN22 MN23 MN24 MN100 MN101 MN102 MN103 R14 R15 R16 R17 R18 R19 R20 R21 R22 R23 R24 R25 T1 T2 T3 T4 VT1 VT2 VT3
net class CLK_PATH: CLK_XO LMK_CLK NetC154_1 NetC155_1 NetC199_1 NetC281_1 NetIC9_17 NetIC9_18 REF_CLK_IN REF_CLK_OUT RXPLL_CLK TXPLL_CLK
component class 05_LMS7002M_Misc: C1 C2 FL1 IC1 IC2 MECH1 MECH2 MECH3 MECH4 MECH5 MECH6 MECH7 MECH8 MECH9 MECH10 MECH11 MECH12 MECH13 MECH14 MECH15 R1 R2 R3 R4 R5 R6 R7 R8 R9 R10 R11 R12 R13
net class LMS_PORT1: LMS_DIQ1_D0 LMS_DIQ1_D1 LMS_DIQ1_D2 LMS_DIQ1_D3 LMS_DIQ1_D4 LMS_DIQ1_D5 LMS_DIQ1_D6 LMS_DIQ1_D7 LMS_DIQ1_D8 LMS_DIQ1_D9 LMS_DIQ1_D10 LMS_DIQ1_D11 LMS_EN_IQSEL1 LMS_FCLK1 LMS_MCLK1 LMS_TXNRX1
net class LMS_PORT2: LMS_DIQ2_D0 LMS_DIQ2_D1 LMS_DIQ2_D2 LMS_DIQ2_D3 LMS_DIQ2_D4 LMS_DIQ2_D5 LMS_DIQ2_D6 LMS_DIQ2_D7 LMS_DIQ2_D8 LMS_DIQ2_D9 LMS_DIQ2_D10 LMS_DIQ2_D11 LMS_EN_IQSEL2 LMS_FCLK2 LMS_MCLK2 LMS_TXNRX2
component class 10_Misc: C154 C155 C156 C157 C158 C159 C160 C161 C162 C163 C164 C165 C166 C167 C168 C169 C170 C171 C172 C173 C174 C175 C176 C177 C178 C179 C180 C181 C182 C183 C184 C185 C186 C187 C188 C189 C190 C191 C192 C193 C194 C195 C196 C197 C198 C199 C200 C201 ESD4 ESD5 FR38 FR39 FR40 FR41 FR42 FR44 FR45 FR51 IC9 IC10 IC11 IC12 IC13 IC14 IC15 IC16 IC17 IC18 IC19 IC20 J7 J8 J9 LED1 LED2 LED3 R61 R62 R63 R64 R65 R66 R67 R68 R69 R70 R71 R72 R73 R74 R75 R76 R77 R78 R79 R80 R81 R82 R83 R84 R85 R86 R87 R88 R89 R90 R91 R92 R93 R94 R95 R96 R97 R98 R99 R100 R101 R102 R103 SB1 SB2 SB3 SB4 VT4 XO1
net class FPGA_SPI_LMS: FPGA_SPI_LMS_SS FPGA_SPI_MISO FPGA_SPI_MOSI FPGA_SPI_SCLK NetC2_1 NetIC1_D28 NetIC1_F28 NetIC1_F30
net class LMS_I2C: LMS_I2C_SCL LMS_I2C_SDA
net class +3.3V_DIG_LMK: +3.3V_DIG_LMK
net class AVDD_FT: AVDD_FT
net class VD10_FT: VD10_FT
net class VCC3P3: VCC3P3
net class FPGA_EGPIO: FPGA_EGPIO0 FPGA_EGPIO1
net class BOM_VER: BOM_VER0 BOM_VER1 BOM_VER2
net class RF_CTRL: RFSW_RX_V1 RFSW_RX_V2 RFSW_TX_V1 RFSW_TX_V2 TX_LB_AT TX_LB_SH
net class VCC1P4_LMS: VCC1P4_LMS
net class VCC1P25_LMS: VCC1P25_LMS
differential pair RX1_W_A: +RX1_W_A_P -RX1_W_A_N
differential pair TX2_1_B: +TX2_1_B_P -TX2_1_B_N
differential pair TX2_1_A: +TX2_1_A_P -TX2_1_A_N
differential pair TX1_1_B: +TX1_1_B_P -TX1_1_B_N
differential pair TX1_1_A: +TX1_1_A_P -TX1_1_A_N
differential pair RX2_W_B: +RX2_W_B_P -RX2_W_B_N
differential pair RX1_H_B: +RX1_H_B_P -RX1_H_B_N
differential pair RX1_H_A: +RX1_H_A_P -RX1_H_A_N
differential pair USB_SSTX: +USB_SSTX_P -USB_SSTX_N
differential pair USB_SSTXI: +USB_SSTXI_P -USB_SSTXI_N
differential pair USB_SSRX: +USB_SSRX_P -USB_SSRX_N
differential pair USB_D: +USB_D_P -USB_D_N

## Components (designator, comment, footprint, x,y, rotation, side; value= is the part's Value field where it differs from the comment)
C1 "1uF, 25V" CAP0402#1 37.438,5.725 r90 bottom
C2 "10pF, 25V" CAP0402#1 41.275,8.625 r270 bottom
C3 "100pF, 50V" CAP0402#1 57.665,9.4 r0 bottom
C4 "100nF, 16V" CAP0402#1 52.825,9.875 r0 bottom
C5 "100pF, 50V" CAP0402#1 54.382,9.432 r270 bottom
C6 "100nF, 16V" CAP0402#1 64,7.5 r270 bottom
C7 "100pF, 50V" CAP0402#1 63.975,5.35 r270 bottom
C8 "100nF, 16V" CAP0402#1 43.892,6.467 r0 bottom
C9 "47pF, 50V" CAP0402#2 58.975,12.25 r90 top
C10 "510pF" CAP0402#2 62.125,9.25 r0 top
C11 "510pF" CAP0402#2 58.975,7.65 r270 top
C12 "47pF, 50V" CAP0402#2 61.75,11.875 r90 top
C13 "10nF, 50V" CAP0402#1 60.375,7.525 r90 bottom
C14 "10nF, 50V" CAP0402#1 60.225,10.75 r90 bottom
C15 "100nF, 16V" CAP0402#1 45.192,7.925 r270 bottom
C16 "100pF, 50V" CAP0402#1 57.665,10.5 r0 bottom
C17 "100pF, 50V" CAP0402#1 43.9,4.575 r180 bottom
C18 "100nF, 16V" CAP0402#1 43.9,3.55 r0 bottom
C19 "100pF, 50V" CAP0402#1 57.475,23.25 r90 bottom
C20 "100pF, 50V" CAP0402#1 58.9,25.825 r270 bottom
C21 "100nF, 16V" CAP0402#1 65.2,27.45 r180 bottom
C22 "100pF, 50V" CAP0402#1 62.75,28.225 r180 bottom
C23 "100pF, 50V" CAP0402#1 63.175,14 r270 bottom
C24 "47pF, 50V" CAP0402#2 56.025,27.05 r180 top
C25 "510pF" CAP0402#2 61.825,23.825 r270 top
C26 "510pF" CAP0402#2 59.35,22.1 r270 top
C27 "47pF, 50V" CAP0402#2 62.25,27.275 r0 top
C28 "10nF, 50V" CAP0402#1 59.025,23.8 r0 bottom
C29 "10nF, 50V" CAP0402#1 59.9,25.975 r90 bottom
C30 "1uF, 6.3V" CAP0201#1 41.925,17.621 r270 bottom value="1uF, 20%"
C31 "1nF, 10%" CAP0201#1 42.676,17.621 r270 bottom
C32 "1uF, 6.3V" CAP0201#1 44.9,9.875 r270 bottom value="1uF, 20%"
C33 "1uF, 6.3V" CAP0201#1 43.525,11.5 r270 bottom value="1uF, 20%"
C34 "1uF, 6.3V" CAP0201#1 42.251,10.071 r270 bottom value="1uF, 20%"
C35 "1uF, 6.3V" CAP0201#1 50.825,15.4 r180 bottom value="1uF, 20%"
C36 "1uF, 6.3V" CAP0201#1 44.773,18.977 r315 bottom value="1uF, 20%"
C37 "1uF, 6.3V" CAP0201#1 37.875,12.373 r270 bottom value="1uF, 20%"
C38 "1nF, 10%" CAP0201#1 38.926,12.371 r270 bottom
C39 "1uF, 6.3V" CAP0201#1 39.125,13.823 r270 bottom value="1uF, 20%"
C40 "1nF, 10%" CAP0201#1 39.851,13.814 r270 bottom
C41 "1uF, 6.3V" CAP0201#1 41.925,16.531 r270 bottom value="1uF, 20%"
C42 "1nF, 10%" CAP0201#1 42.676,16.521 r270 bottom
C43 "1uF, 6.3V" CAP0201#1 50.251,11.287 r315 bottom value="1uF, 20%"
C44 "1uF, 6.3V" CAP0201#1 49.445,15 r180 bottom value="1uF, 20%"
C45 "1uF, 6.3V" CAP0201#1 49.474,10.42 r270 bottom value="1uF, 20%"
C46 "1uF, 6.3V" CAP0201#1 44.05,9.725 r180 bottom value="1uF, 20%"
C47 "1nF, 10%" CAP0201#1 44.95,12.655 r90 bottom
C48 "1uF, 6.3V" CAP0201#1 44.302,12.576 r90 bottom value="1uF, 20%"
C49 "1uF, 6.3V" CAP0201#1 43.65,12.575 r270 bottom value="1uF, 20%"
C50 "1uF, 6.3V" CAP0201#1 42.325,19.2 r270 bottom value="1uF, 20%"
C51 "1uF, 6.3V" CAP0201#1 41.326,22.221 r90 bottom value="1uF, 20%"
C52 "1uF, 6.3V" CAP0201#1 43.175,21.55 r180 bottom value="1uF, 20%"
C53 "1uF, 6.3V" CAP0201#1 44.12,20.903 r180 bottom value="1uF, 20%"
C54 "1uF, 6.3V" CAP0201#1 44.95,21.7 r90 bottom value="1uF, 20%"
C55 "1uF, 6.3V" CAP0201#1 49.925,19.925 r45 bottom value="1uF, 20%"
C56 "1uF, 6.3V" CAP0201#1 49.15,17.1 r90 bottom value="1uF, 20%"
C57 "1uF, 6.3V" CAP0201#1 51.103,12.878 r0 bottom value="1uF, 20%"
C58 "1uF, 6.3V" CAP0201#1 48.195,12.6 r0 bottom value="1uF, 20%"
C59 "1uF, 6.3V" CAP0201#1 49.725,9.275 r0 bottom value="1uF, 20%"
C60 "1uF, 6.3V" CAP0201#1 52.85,14.05 r90 bottom value="1uF, 20%"
C61 "1nF, 10%" CAP0201#1 43.775,10.35 r0 bottom
C62 "1uF, 6.3V" CAP0201#1 43.425,9.125 r0 bottom value="1uF, 20%"
C63 "1uF, 6.3V" CAP0201#1 50.388,19.142 r0 bottom value="1uF, 20%"
C64 "1uF, 6.3V" CAP0201#1 51.05,18.55 r0 bottom value="1uF, 20%"
C65 "1uF, 6.3V" CAP0201#1 49.825,17.1 r270 bottom value="1uF, 20%"
C66 "1uF, 6.3V" CAP0201#1 45.55,22.7 r90 bottom value="1uF, 20%"
C67 "1uF, 6.3V" CAP0201#1 42.326,9.196 r180 bottom value="1uF, 20%"
C68 "4.7uF, 6.3V" CAP0402#1 51.761,4.13 r90 bottom
C69 "4.7uF, 6.3V" CAP0402#1 50.625,7.75 r180 bottom
C70 "10uF, 6.3V" CAP0603#1 30.75,5.875 r0 bottom
C71 "100pF, 50V" CAP0402#1 46.15,5.45 r90 bottom
C72 "1nF, 10%" CAP0201#1 40.901,16.646 r135 bottom
C73 "1uF, 6.3V" CAP0201#1 43.026,15.596 r0 bottom value="1uF, 20%"
C74 "1nF, 10%" CAP0201#1 39.625,11.558 r90 bottom
C75 "1uF, 6.3V" CAP0201#1 39.77,12.441 r180 bottom value="1uF, 20%"
C76 "1nF, 10%" CAP0201#1 38.95,15.755 r90 bottom
C77 "1uF, 6.3V" CAP0201#1 38.036,15.755 r90 bottom value="1uF, 20%"
C78 "1nF, 10%" CAP0201#1 39.926,16.821 r90 bottom
C79 "1uF, 6.3V" CAP0201#1 39.146,17.101 r90 bottom value="1uF, 20%"
C80 "1nF, 10%" CAP0201#1 39.2,19.091 r270 bottom
C81 "1uF, 6.3V" CAP0201#1 40.05,19.091 r270 bottom value="1uF, 20%"
C82 "4.7uF, 6.3V" CAP0402#1 58.006,3.9 r90 bottom
C83 "4.7uF, 6.3V" CAP0402#1 56.586,7.655 r0 bottom
C84 "100pF, 50V" CAP0402#1 54.486,7.655 r180 bottom
C85 "1uF, 6.3V" CAP0201#1 51.246,11.071 r270 bottom value="1uF, 20%"
C86 "1uF, 6.3V" CAP0201#1 45.8,9.45 r180 bottom value="1uF, 20%"
C87 "1uF, 6.3V" CAP0201#1 46.505,10.325 r270 bottom value="1uF, 20%"
C88 "1uF, 6.3V" CAP0201#1 46.275,12.45 r0 bottom value="1uF, 20%"
C89 "1uF, 6.3V" CAP0201#1 39.173,21.405 r315 bottom value="1uF, 20%"
C90 "1uF, 6.3V" CAP0201#1 45.476,20.091 r270 bottom value="1uF, 20%"
C91 "1uF, 6.3V" CAP0201#1 51.1,17.9 r0 bottom value="1uF, 20%"
C92 "1uF, 6.3V" CAP0201#1 51.001,13.696 r0 bottom value="1uF, 20%"
C93 "1uF, 6.3V" CAP0201#1 40.946,20.841 r180 bottom value="1uF, 20%"
C94 "1uF, 6.3V" CAP0201#1 52.925,11.7 r90 bottom value="1uF, 20%"
C95 "1uF, 6.3V" CAP0201#1 40.575,21.758 r90 bottom value="1uF, 20%"
C96 "1uF, 6.3V" CAP0201#1 54.4,10.8 r0 bottom value="1uF, 20%"
C97 "100nF, 16V" CAP0402#1 31.45,22.775 r0 bottom
C98 "100nF, 10V" CAP0201#2 24.927,18.307 r90 bottom
C99 "10uF, 6.3V" CAP0603#1 27.935,19.485 r270 bottom
C100 "1uF, 6.3V" CAP0201#1 24.752,15.76 r225 bottom
C101 "100nF, 10V" CAP0201#2 30.8,18.3 r0 bottom
C102 "10nF, 50V" CAP0402#1 27.425,16.8 r90 bottom
C103 "100nF, 10V" CAP0201#2 27.4,13.6 r90 bottom
C104 "10nF, 50V" CAP0402#1 30.575,17.45 r180 bottom
C105 "100nF, 10V" CAP0201#2 26.625,17.1 r270 bottom
C106 "100nF, 10V" CAP0201#2 29.153,15.735 r180 bottom
C107 "100nF, 10V" CAP0201#2 28.2,16.75 r270 bottom
C108 "100nF, 10V" CAP0201#2 26.425,13.6 r90 bottom
C109 "10nF, 50V" CAP0402#1 26.375,14.95 r180 bottom
C110 "100nF, 10V" CAP0201#2 25.925,18.375 r0 bottom
C111 "1uF, 6.3V" CAP0201#1 28.925,16.75 r90 bottom
C112 "100nF, 10V" CAP0201#2 28.95,14 r90 bottom
C113 "10nF, 50V" CAP0402#1 25.8,16.925 r90 bottom
C114 "100nF, 10V" CAP0201#2 24.675,13.425 r180 bottom
C115 "10nF, 50V" CAP0402#1 29.025,18.525 r270 bottom
C116 "10uF, 6.3V" CAP0603#1 32.3,18.225 r90 bottom
C117 "1uF, 6.3V" CAP0201#1 31.275,19.25 r270 bottom
C118 "100nF, 10V" CAP0201#2 29.15,14.925 r180 bottom
C119 "10nF, 50V" CAP0402#1 30.45,19.675 r270 bottom
C120 "100nF, 10V" CAP0201#2 32.5,20.4 r90 bottom
C121 "10uF, 6.3V" CAP0603#1 22.05,19.05 r270 bottom
C122 "1uF, 6.3V" CAP0201#2 28.26,14.092 r90 bottom value="1uF, 20%"
C123 "100nF, 10V" CAP0201#2 25.225,12.425 r180 bottom
C124 "10nF, 50V" CAP0402#1 26.5,11.325 r180 bottom
C125 "100nF, 10V" CAP0201#2 25,14.425 r270 bottom
C126 "100nF, 10V" CAP0201#2 24.975,16.9 r270 bottom
C127 "100nF, 10V" CAP0201#1 9.45,15 r0 top
C128 "100nF, 10V" CAP0201#1 9.45,14.37 r0 top
C129 "100nF, 16V" CAP0402#1 1.75,16.275 r0 bottom
C130 "10pF, 25V" CAP0402#2 8.775,20.45 r270 top
C131 "10pF, 25V" CAP0402#2 8.275,22.55 r90 top
C132 "100nF, 16V" CAP0402#1 5.375,20.825 r270 bottom
C133 "100nF, 16V" CAP0402#1 2.75,11.65 r180 bottom
C134 "10uF, 6.3V" CAP0603#1 14.575,9.725 r0 bottom
C135 "1uF, 6.3V" CAP0201#1 15.82,11.355 r270 bottom
C136 "100nF, 10V" CAP0201#2 14,19.025 r0 bottom
C137 "1uF, 6.3V" CAP0201#1 10.525,17.675 r0 bottom
C138 "100nF, 10V" CAP0201#2 11.75,16.85 r90 bottom
C139 "1uF, 6.3V" CAP0201#1 9.875,12.75 r270 bottom
C140 "100nF, 10V" CAP0201#2 18.595,12.925 r180 bottom
C141 "1uF, 6.3V" CAP0201#2 12.875,19.025 r0 bottom
C142 "100nF, 10V" CAP0201#1 14.85,11.05 r180 bottom
C143 "10uF, 6.3V" CAP0603#1 10.85,11.825 r270 bottom
C144 "1uF, 6.3V" CAP0201#2 14.18,12.755 r270 bottom
C145 "100nF, 10V" CAP0201#2 11.865,15.285 r0 bottom
C146 "10nF, 50V" CAP0402#1 9.925,14.425 r180 bottom
C147 "100nF, 10V" CAP0201#2 10.9,9.8 r0 bottom
C148 "10nF, 50V" CAP0402#1 9.925,15.425 r180 bottom
C149 "100nF, 10V" CAP0201#2 11.865,14.085 r0 bottom
C150 "10nF, 50V" CAP0402#1 15.525,12.475 r0 bottom
C151 "10uF, 6.3V" CAP0603#1 7.725,9.175 r0 bottom
C152 "1uF, 6.3V" CAP0201#2 11.15,7.325 r90 bottom
C153 "100nF, 16V" CAP0402#1 12.025,7.275 r270 bottom
C154 "100nF, 16V" CAP0402#2 21.45,27 r0 top
C155 "100nF, 16V" CAP0402#2 18.825,27.675 r270 top
C156 "100nF, 16V" CAP0402#3 33.925,20.4 r270 bottom
C157 "18nF, 16V" CAP0402#1 23.725,27.95 r0 bottom
C158 "47pF, 50V" CAP0402#2 24.675,26.275 r270 top
C159 "1uF, 25V" CAP0402#2 23.7,27.825 r180 top
C160 "47pF, 50V" CAP0402#2 23.575,24.1 r270 top
C161 "100nF, 16V" CAP0402#1 32.9,30.2 r90 bottom
C162 "100nF, 16V" CAP0402#2 21.425,28.225 r0 top
C163 "100nF, 16V" CAP0402#1 14.1,27.7 r0 bottom
C164 "1uF, 25V" CAP0402#2 20.625,25 r0 top
C165 "1uF, 25V" CAP0402#2 17.225,25.025 r90 top
C166 "100nF, 16V" CAP0402#1 16.075,27.925 r0 bottom
C167 "100pF, 50V" CAP0402#1 15.6,24.55 r0 bottom
C168 "100pF, 50V" CAP0402#2 19.25,23.45 r90 top
C169 "100pF, 50V" CAP0402#1 16.425,26.2 r270 bottom
C170 "100pF, 50V" CAP0402#2 16.575,22.9 r0 top
C171 "100nF, 16V" CAP0402#2 20.825,26 r0 top
C172 "100pF, 50V" CAP0402#2 20.49,23.44 r90 top
C173 "100pF, 50V" CAP0402#2 18.75,26 r180 top
C174 "100nF, 16V" CAP0402#1 39.55,25.2 r180 bottom
C175 "100nF, 16V" CAP0402#1 9.6,25.025 r180 bottom
C176 "22uF, 10V" CAP0603#2 25.125,8.325 r0 top
C177 "22uF, 10V" CAP0603#2 28.65,7.675 r270 top
C178 "4.7uF, 6.3V" CAP0402#1 24.125,4.25 r90 bottom
C179 "4.7uF, 6.3V" CAP0402#1 23.625,8.05 r0 bottom
C180 "100nF, 16V" CAP0402#2 12.925,23.25 r270 top
C181 "100nF, 16V" CAP0402#1 44.9,26.3 r45 bottom
C182 "16pF, 50V" CAP0402#2 28.975,4.575 r270 top
C183 "100nF, 16V" CAP0402#2 15.4,25.6 r0 top
C184 "1nF, 50V" CAP0402#2 15.4,26.6 r0 top
C185 "100nF, 16V" CAP0402#1 21.6,21.875 r0 bottom
C186 "100nF, 16V" CAP0402#1 7.475,25.625 r0 bottom
C187 "10nF, 50V" CAP0402#1 31.9,30.2 r90 bottom
C188 "22uF, 10V" CAP0603#2 16.15,8.85 r0 top
C189 "22uF, 10V" CAP0603#2 20.2,8.5 r180 top
C190 "4.7uF, 6.3V" CAP0402#2 13.25,4.325 r0 top
C191 "4.7uF, 6.3V" CAP0402#2 7.175,10.425 r270 top
C192 "100pF, 50V" CAP0402#1 12.5,9.325 r270 bottom
C193 "82pF, 50V" CAP0402#2 20.299,6.773 r270 top
C194 "1uF, 25V" CAP0402#1 15.525,3.625 r0 bottom
C195 "100nF, 16V" CAP0402#1 7.325,3.925 r90 bottom
C196 "10uF, 6.3V" CAP0603#1 14.425,23.5 r0 bottom
C197 "4.7uF, 6.3V" CAP0402#2 8,8.575 r0 top
C198 "10uF, 6.3V" CAP0603#2 8.3,4.5 r90 top
C199 "100nF, 16V" CAP0402#2 23.3,22.55 r0 top
C200 "100nF, 16V" CAP0402#2 20.1,21.925 r0 top
C201 "100nF, 16V" CAP0402#2 39.8,24.75 r270 top
ESD1 "ESD8472" ESD8472_X3DFN2#1 62.4,8.425 r180 top
ESD2 "ESD8472" ESD8472_X3DFN2#1 62.65,22.65 r270 top
ESD3 "ESD7016" ESD7016 8.08,14.685 r0 top
ESD4 "ESD8472" ESD8472_X3DFN2#2 35.45,28.025 r90 top
ESD5 "ESD8472" ESD8472_X3DFN2#2 40.175,26.7 r270 top
FL1 "Fiducial" Fiducial_local 37.3,22.075 r0 top
FR1 "600R, 0.27A" RES0201#1 43.65,19.2 r180 bottom value=600R@100MHz
FR2 "600R, 0.27A" RES0201#1 50.625,16.35 r90 bottom value=600R@100MHz
FR3 "600R, 0.27A" RES0201#1 41.325,6.025 r0 bottom value=600R@100MHz
FR4 "600R, 0.27A" RES0201#1 47.775,11.725 r270 bottom value=600R@100MHz
FR5 "600R, 0.27A" RES0201#1 52.075,12.3 r0 bottom value=600R@100MHz
FR6 "600R, 0.27A" RES0201#1 49.725,15.9 r90 bottom value=600R@100MHz
FR7 "600R, 0.27A" RES0201#1 48.7,19.45 r90 bottom value=600R@100MHz
FR8 "600R, 0.27A" RES0201#1 49.275,20.525 r90 bottom value=600R@100MHz
FR9 "600R, 0.27A" RES0201#1 44.375,22.65 r90 bottom value=600R@100MHz
FR10 "600R, 0.27A" RES0201#1 43.725,22.475 r90 bottom value=600R@100MHz
FR11 "600R, 0.27A" RES0201#1 43.075,22.45 r90 bottom value=600R@100MHz
FR12 "600R, 0.27A" RES0201#1 50.625,8.8 r270 bottom value=600R@100MHz
FR13 "600R, 0.27A" RES0201#1 41.425,19.8 r180 bottom value=600R@100MHz
FR14 "600R, 0.27A" RES0201#1 42.35,12.25 r180 bottom value=600R@100MHz
FR15 "600R, 0.27A" RES0201#1 42.421,5.62 r90 bottom value=600R@100MHz
FR16 "600R, 0.27A" RES0201#1 43.925,8.2 r270 bottom value=600R@100MHz
FR17 "600R, 0.27A" RES0201#1 53.55,12.68 r270 bottom value=600R@100MHz
FR18 "600R, 0.27A" RES0201#1 53.825,13.775 r0 bottom value=600R@100MHz
FR19 "600R, 0.27A" RES0201#1 46.625,23.375 r0 bottom value=600R@100MHz
FR20 "600R, 0.27A" RES0201#1 51.375,19.725 r0 bottom value=600R@100MHz
FR21 "600R, 0.27A" RES0201#1 43.2,8.225 r270 bottom value=600R@100MHz
FR22 "220R, 0.9A" RES0402#1 50.686,2.83 r90 bottom
FR23 "600R, 2A" RES0805#1 30.775,4.375 r0 bottom
FR24 "600R, 0.27A" RES0201#1 52.05,11.075 r270 bottom value=600R@100MHz
FR25 "220R, 0.9A" RES0402#1 56.936,2.605 r90 bottom
FR26 "600R, 0.27A" RES0201#1 51.374,14.509 r180 bottom value=600R@100MHz
FR27 "600R, 0.27A" RES0201#1 51.1,17.25 r180 bottom value=600R@100MHz
FR28 "600R, 0.27A" RES0201#1 45.901,21.571 r90 bottom value=600R@100MHz
FR29 "600R, 0.27A" RES0201#1 38.8,22.496 r90 bottom value=600R@100MHz
FR30 "600R, 0.27A" RES0201#1 46.3,11.8 r0 bottom value=600R@100MHz
FR31 "600R, 0.27A" RES0201#1 46.905,11.175 r0 bottom value=600R@100MHz
FR32 "600R, 0.27A" RES0201#1 47.175,10 r90 bottom value=600R@100MHz
FR33 "600R, 0.27A" RES0201#1 53.825,11.45 r180 bottom value=600R@100MHz
FR34 "600R, 0.27A" RES0201#1 41.876,21.121 r90 bottom value=600R@100MHz
FR35 "220R, 0.9A" RES0402#1 1.752,15.17 r180 bottom
FR36 "600R, 2A" RES0805#1 4.775,12.65 r270 bottom
FR37 "220R, 0.9A" RES0402#1 10.2,8.25 r270 bottom
FR38 "600R, 0.27A" RES0201#1 30.8,30.7 r0 bottom value=600R@100MHz
FR39 "600R, 0.27A" RES0201#1 16.808,26.597 r270 top value=600R@100MHz
FR40 "600R, 0.27A" RES0201#1 17.75,27.35 r270 top value=600R@100MHz
FR41 "600R, 0.27A" RES0201#1 11.25,25.05 r180 bottom value=600R@100MHz
FR42 "600R, 0.27A" RES0201#2 11.85,23.85 r0 top value=600R@100MHz
FR44 "220R, 0.9A" RES0402#1 13.75,22.35 r0 bottom
FR45 "220R, 0.9A" RES0402#2 8.475,6.975 r270 top
IC1 "LMS7002M" LMS7002M_v5 45.391,15.641 r180 top locked
IC2 "M24128" M24128-DFMC6TG 36.5,2.8 r90 bottom
IC3 "SKY13411-374LF" SKY13411-374LF 59.475,9.925 r90 top
IC4 "SKY13411-374LF" SKY13411-374LF 59.85,25.375 r90 top
IC5 "LD39100PUR" LD39100PUR 49.275,5.575 r90 bottom
IC6 "LD39100PUR" LD39100PUR 55.525,5.35 r90 bottom
IC7 "LFE5U-45F-MG285" LFE5U-25F-8MG285C_LATTICE_FPGA 27.185,15.685 r180 top locked
IC8 "FT601Q" FT601Q 15.025,15.685 r270 top locked
IC9 "LMK00101" LMK00101_WQFN32_r1 19.825,25.25 r0 bottom
IC10 "LM75" HWSON8_LM75 36,22.925 r270 bottom
IC11 "DAC6311IDCK" AD5601_SOT23-6 10.875,26.65 r180 bottom
IC12 "M24128" M24128-DFMC6TG 42.575,24.25 r180 bottom
IC13 "LD39100PUR" LD39100PUR 21.475,5.85 r90 bottom
IC14 "LMZ20501SILR" LMZ20501SILR_DC-DC_8-SMD 25.95,5.875 r0 top
IC15 "W25Q128JVSIQ" S25FL164K_WSON8_DFN6 50.225,26.125 r315 bottom
IC16 "AD5662" AD5662_SOT23-8 12.275,26.325 r180 top
IC17 "AS431" SOT23-3_V3 8.6,26.475 r0 top
IC18 "LD39100PUR" LD39100PUR 12.625,6.725 r180 top
IC19 "LMZ20501SILR" LMZ20501SILR_DC-DC_8-SMD 17.95,5.65 r90 top
IC20 "ATECC508A" ATECC508A_UDFN8_v2 37.2,26.375 r0 top
J1 "SMA board edge" SMA_CONNECTOR_BOARD_EDGE_SM 66.845,8.437 r90 top locked
J2 "SMA board edge" SMA_CONNECTOR_BOARD_EDGE_SM 66.845,22.937 r90 top locked
J3 "FPGA GPIO" SWD_10_pin 28.65,24.785 r270 top
J4 "FPGA EGPIO (board edge)" Header5x1_TH_v2 13.225,0.795 r0 top
J5 "FPGA JTAG (board edge)" HEADER7X1_TH_V2 15.725,30.575 r0 top
J6 "USB3.0_MALE" USB3A_SM 3.65,15.685 r90 top locked
J7 "U.FL/MMCX" MMCX_UFL_conn_u#1 36.025,28.3 r0 bottom
J8 "U.FL/MMCX" MMCX_UFL_conn_u#2 40.625,28.3 r0 bottom
J9 "FAN" Header2x1_TH_v2 47.825,0.795 r0 top
LED1 "LED_RG" LED-2x0603 62.465,15.685 r0 top
LED2 "LED_RG" LED-2x0603 65.425,29.075 r180 top
LED3 "LED_RG" LED-2x0603 65.425,2.275 r180 top
MECH1 "RFI Shield" WURTHELECTRONIC_RF_SHIELD 6.2,2.275 r0 top
MECH2 "RFI Shield clip" RFI_SHIELD_CLPS_MINI#1 11.475,2.425 r180 top
MECH3 "RFI Shield clip" RFI_SHIELD_CLPS_MINI#2 27.975,2.425 r180 top
MECH4 "RFI Shield clip" RFI_SHIELD_CLPS_MINI#2 11.475,28.925 r180 top
MECH5 "RFI Shield clip" RFI_SHIELD_CLPS_MINI#2 27.975,28.925 r180 top
MECH6 "RFI Shield clip" RFI_SHIELD_CLPS_MINI#3 39.25,2.425 r0 top
MECH7 "RFI Shield clip" RFI_SHIELD_CLPS_MINI#3 55.75,28.925 r0 top
MECH8 "RFI Shield clip" RFI_SHIELD_CLPS_MINI#3 39.25,28.925 r0 top
MECH9 "RFI Shield clip" RFI_SHIELD_CLPS_MINI#4 55.75,2.425 r0 top
MECH10 "RFI Shield" WurthElectronic_RF_shield 60.85,29.075 r180 top
MECH11 "RFI Shield clip" RFI_SHIELD_CLPS_MINI#2 11.475,2.425 r0 bottom
MECH12 "RFI Shield clip" RFI_SHIELD_CLPS_MINI#2 27.975,2.425 r0 bottom
MECH13 "RFI Shield clip" RFI_SHIELD_CLPS_MINI#2 11.475,28.925 r0 bottom
MECH14 "RFI Shield clip" RFI_SHIELD_CLPS_MINI#2 27.975,28.925 r0 bottom
MECH15 "RFI Shield" WURTHELECTRONIC_RF_SHIELD 33.05,2.275 r180 bottom
MN1 "8.2nH, 5%" RES0402#2 54.493,9.877 r180 top
MN2 "8.2nH, 5%" RES0402#2 56.493,9.877 r0 top
MN3 "100uH" RES0805_0603 63.95,7.525 r270 top
MN4 "0.8pF" CAP0402#2 56,12.485 r90 top
MN5 "1pF" CAP0402#2 55.5,10.935 r0 top
MN6 "0.5pF" CAP0402#2 55.5,14.035 r180 top
MN7 "0.8pF" CAP0402#2 55,12.485 r270 top
MN8 "100uH" RES0805#2 46.438,4.041 r180 top
MN9 "100uH" RES0805#2 46.425,6.963 r180 top
MN10 "0R" RES0402#2 48.435,4.515 r270 top
MN11 "0R" RES0402#2 48.435,6.515 r90 top
MN12 "100nF, 16V" CAP0402#2 51.035,6.015 r180 top
MN13 "1pF" CAP0402#2 49.485,5.515 r270 top
MN14 "2pF" CAP0402#2 52.585,5.515 r90 top
MN15 "100nF, 16V" CAP0402#2 51.035,5.015 r0 top
MN16 "2pF" CAP0402#2 45.2,25.8 r180 top
MN17 "100uH" RES0805_0603 63.95,23.825 r90 top
MN18 "0.5pF" CAP0402#2 46.8,26.3 r270 top
MN19 "1pF" CAP0402#2 43.65,26.3 r270 top
MN20 "2pF" CAP0402#2 45.2,26.8 r180 top
MN21 "510pF" CAP0402#2 51.525,22.55 r180 top
MN22 "8.2nH, 5%" RES0402#2 53.125,23.05 r270 top
MN23 "1.2pF" CAP0402#2 49.975,23.05 r270 top
MN24 "510pF" CAP0402#2 51.525,23.55 r180 top
R1 "2k2, 1%" RES0402#1 35.4,5.275 r0 bottom
R2 "2k2, 1%" RES0402#1 35.4,6.475 r0 bottom
R3 "10k, 1%" RES0402#1 32.075,14.275 r90 bottom
R4 "10k, 1%" RES0402#1 28.635,9.885 r270 bottom
R5 "10k, 1%" RES0402#1 35.175,14.25 r270 bottom
R6 "10k, 1%" RES0402#1 35.446,15.86 r0 bottom
R7 "10k, 1%" RES0402#2 35.775,14.825 r90 top
R8 "49.9R, 1%" RES0402#1 39.651,7.796 r180 bottom
R9 "49.9R, 1%" RES0402#1 38.85,10.003 r180 bottom
R10 "49.9R, 1%" RES0402#1 39.65,8.903 r180 bottom
R11 "49.9R, 1%" RES0402#1 36.6,9.428 r180 bottom
R12 "10k, 1%" RES0402#1 30.25,10.4 r0 bottom
R13 "10k, 1%" RES0402#1 45.325,14.078 r135 bottom
R14 "0R" RES0402#1 62.3,6.975 r0 bottom
R15 "0R" RES0402#1 62.3,5.878 r0 bottom
R16 "560R, 1%" RES0402#1 63,20.925 r180 bottom
R17 "100R, 1%" RES0402#1 59.025,22.75 r180 bottom
R18 "2.49k, 1%" RES0402#1 63.5,19.325 r90 bottom
R19 "1k, 1%" RES0402#1 61.175,13.425 r180 bottom
R20 "0R" RES0402#1 64.35,29 r270 bottom
R21 "0R" RES0402#1 65.45,29 r270 bottom
R22 "49.9R, 1%" RES0402#1 61.725,19.325 r270 bottom
R23 "49.9R, 1%" RES0402#1 63,22.025 r0 bottom
R24 "100R, 1%" RES0402#1 57.85,25.35 r270 bottom
R25 "100R, 1%" RES0402#1 63.175,16.05 r270 bottom
R26 "0R" RES0402#1 34.675,9.5 r90 bottom
R27 "0R" RES0402#1 35.4,11.725 r90 bottom
R28 "10R" RES0201#1 50.125,10.175 r270 bottom
R29 "10R" RES0201#1 50.9,9.925 r270 bottom
R30 "0R" RES0201#1 42.556,8.326 r270 bottom
R31 "8.2k, 1%" RES0402#1 52.311,6.53 r180 bottom
R32 "0R" RES0402#1 37.826,19.371 r0 bottom
R33 "15k, 1%" RES0402#1 52.811,4.93 r90 bottom
R34 "0R" RES0402#1 37.822,18.275 r0 bottom
R35 "0R" RES0402#1 37.301,14.621 r0 bottom
R36 "0R" RES0402#1 37.8,11.278 r0 bottom
R37 "0R" RES0402#1 41.976,14.971 r90 bottom
R38 "7.5k, 1%" RES0402#1 58.561,6.305 r180 bottom
R39 "10k, 1%" RES0402#1 59.05,4.7 r90 bottom
R40 "10R" RES0201#1 53.275,10.8 r180 bottom
R41 "10R" RES0201#1 39.801,22.496 r270 bottom
R42 "0R" RES0402#1 31.95,24.325 r270 bottom
R43 "0R" RES0402#1 31.594,26.616 r270 bottom
R44 "0R" RES0402#2 31.625,3.925 r180 top
R45 "0R" RES0402#2 31.627,5.02 r180 top
R46 "0R" RES0402#2 31.625,6.125 r180 top
R47 "4K7, 1%" RES0402#1 24.925,21.175 r180 bottom
R48 "4K7, 1%" RES0402#1 25.6,20.1 r180 bottom
R49 "4K7, 1%" RES0402#1 11.7,23.25 r270 bottom
R50 "4K7, 1%" RES0402#1 9.925,23.75 r180 bottom
R51 "4K7, 1%" RES0402#2 7.725,24.15 r0 top
R52 "4K7, 1%" RES0402#1 7.475,26.725 r180 bottom
R53 "0R" RES0402#1 3.775,16.9 r270 bottom
R54 "10k, 1%" RES0402#1 14.475,20.175 r180 bottom
R55 "10k, 1%" RES0402#1 12.3,20.175 r0 bottom
R56 "10k, 1%" RES0402#1 5.375,22.925 r270 bottom
R57 "4K7, 1%" RES0402#1 8.775,10.825 r270 bottom
R58 "10k, 1%" RES0402#1 8.775,12.925 r270 bottom
R59 "22R" RES0402#2 20.65,11.5 r90 top
R60 "1k6, 1%" RES0402#1 10.1,16.475 r0 bottom
R61 "0R" RES0402#2 18.2,23.45 r270 top
R62 "10k, 1%" RES0402#1 37.075,25.375 r0 bottom
R63 "1k, 1%" RES0402#2 10.725,22.25 r0 top
R64 "22R" RES0402#1 14.3,26.1 r270 bottom
R65 "0R" RES0402#2 23.625,26.2 r90 top
R66 "0R" RES0402#2 10.175,23.35 r180 top
R67 "49.9R, 1%" RES0402#2 19.875,27.675 r90 top
R68 "1k, 1%" RES0402#1 33.9,22.4 r90 bottom
R69 "0R" RES0402#2 22.525,25.45 r90 top
R70 "1k, 1%" RES0402#1 34.975,25.375 r0 bottom
R71 "10k, 1%" RES0402#1 3.775,22.95 r0 bottom
R72 "1k, 1%" RES0402#1 1.675,22.95 r180 bottom
R73 "10k, 1%" RES0402#1 15.4,26.1 r270 bottom
R74 "10k, 1%" RES0402#1 24.125,6.35 r90 bottom
R75 "1k, 1%" RES0402#1 55.35,22.625 r315 bottom
R76 "1k, 1%" RES0402#2 14.475,23.35 r180 top
R77 "10k, 1%" RES0402#1 44.65,28.3 r225 bottom
R78 "0R" RES0402#1 13.2,26.15 r270 bottom
R79 "80.6k, 1%" RES0402#2 22.9,3.9 r0 top
R80 "27k, 1%" RES0402#1 25.725,6.375 r0 bottom
R81 "1k, 1%" RES0402#2 14.475,22.25 r180 top
R82 "40.2k, 1%" RES0402#2 23.4,5.6 r270 top
R83 "10k, 1%" RES0402#2 15.225,24.55 r0 top
R84 "10k, 1%" RES0402#2 10.475,5.375 r90 top
R85 "100R, 1%" RES0402#2 63.233,17.66 r0 top
R86 "10k, 1%" RES0402#1 15.525,4.75 r180 bottom
R87 "100R, 1%" RES0402#2 63.233,13.66 r0 top
R88 "237k, 1%" RES0402#2 21.495,6.823 r90 top
R89 "4K7, 1%" RES0402#2 9.975,3.775 r180 top
R90 "0R" RES0402#1 18.425,7.25 r180 bottom
R91 "52.3k, 1%" RES0402#2 20.348,4.526 r90 top
R92 "100R, 1%" RES0402#1 61.175,29.525 r180 bottom
R93 "4K7, 1%" RES0402#1 17.625,3.5 r0 bottom
R94 "0R" RES0402#1 12.9,3.75 r180 bottom
R95 "100R, 1%" RES0402#1 61.175,30.625 r180 bottom
R96 "0R" RES0402#1 11.3,4.85 r180 bottom
R97 "100R, 1%" RES0402#1 60.15,1.425 r0 bottom
R98 "0R" RES0402#2 9,9.625 r180 top
R99 "100R, 1%" RES0402#1 60.15,2.525 r180 bottom
R100 "0R" RES0402#1 7.95,8.025 r0 bottom
R101 "0R" RES0402#1 13.75,5.725 r180 bottom
R102 "0R" RES0402#2 10,24.45 r0 top
R103 "49.9R, 1%" RES0402#2 21.7,22.45 r270 top
SB1 "Solder bridge" SOLDER_BRIDGE_TRIANGULAR_V2 57.325,28.1 r0 bottom value=0R
SB2 "Solder bridge" SOLDER_BRIDGE_TRIANGULAR_V2 55.05,28.1 r0 bottom value=0R
SB3 "Solder bridge" SOLDER_BRIDGE_TRIANGULAR_V2 63.925,2.2 r0 bottom value=0R
SB4 "Solder bridge" SOLDER_BRIDGE_TRIANGULAR_V2 66.65,2.194 r0 bottom value=0R
T1 "TC1-1-13M-45+" TC1-1-13MA+_JA4220-AL_ 55.5,17.11 r0 top
T2 "TC1-1-13M-45+" TC1-1-13MA+_JA4220-AL_ 55.75,5.525 r270 top
T3 "TC1-1-13M-45+" TC1-1-13MA+_JA4220-AL_ 49.825,26.3 r270 top
T4 "TC1-1-13M-45+" TC1-1-13MA+_JA4220-AL_ 56.3,23.05 r270 top
VT1 "ZVN4525E6TA" ZVN4525E6_NMOS_SOT23-6 59.144,20.111 r270 bottom
VT2 "ZVN4525E6TA" ZVN4525E6_NMOS_SOT23-6 61.85,25.025 r90 bottom
VT3 "ZVN4525E6TA" ZVN4525E6_NMOS_SOT23-6 61.05,15.875 r270 bottom
VT4 "IRLML6244TRPBF" SOT23-3 8.55,5.475 r180 bottom
XO1 "T604-040.0M" T604-040.0M_VCTCXO_CONNORWINFIELD 26.825,25 r180 bottom locked
XT1 "30MHz" CRYSTAL_4-LCC 9.025,21.45 r0 bottom

## Footprints (in the part's own frame and the unit in brackets; to place one, negate y for a bottom-side part, rotate by r counter-clockwise, add the part's x,y. Pads: shape width x height; smd on the part's side, far side on the other; paste and mask are expansions set on the pad)
AD5601_SOT23-6 [mm] "SOT23, 6-Leads, Body 2x1.3mm, Pitch 0.65mm, Lead Span 2.1mm, IPC Medium Density"
  rect 0.85x0.4 smd mask+0.05: 1(-0.95,0.65) 2(-0.95,0) 3(-0.95,-0.65) 4(0.95,-0.65) 5(0.95,0) 6(0.95,0.65)
  silkscreen extent -0.95,-1.1 0.15,1.1, body extent -1.05,-1 1.05,1, height 0.43
AD5662_SOT23-8 [mm]
  rect 1x0.4 smd mask+0.05: 1(-1.25,0.975) 2(-1.25,0.325) 3(-1.25,-0.325) 4(-1.25,-0.975) 5(1.25,-0.975) 6(1.25,-0.325) 7(1.25,0.325) 8(1.25,0.975)
  silkscreen extent -1.29,-1.4 0.3,1.51, body extent -1.4,-1.49 1.4,1.45, height 1.2
ATECC508A_UDFN8_v2 [mm]
  rect 0.8x0.3 smd mask+0.05: 1(-1.5,0.75) 2(-1.5,0.25) 3(-1.5,-0.25) 4(-1.5,-0.75) 5(1.5,-0.75) 6(1.5,-0.25) 7(1.5,0.25) 8(1.5,0.75)
  rect 1.4x1.6 smd mask+0.05: PAD(0,0)
  silkscreen extent -1.64,-1.1 1.2,1.24, body extent -1.5,-1 1.5,1, height 0.53
CAP0201#1 [mm]
  rect 0.3x0.35 smd: 1(-0.28,0) 2(0.28,0)
  silkscreen extent -0.2,-0.33 0.2,0.33, body extent -0.3,-0.15 0.3,0.15, height 0.25
CAP0201#2 [mm]
  rect 0.3x0.35 smd mask+0.05: 1(-0.28,0) 2(0.28,0)
  silkscreen extent -0.2,-0.33 0.2,0.32, body extent -0.3,-0.15 0.3,0.15, height 0.25
CAP0402#1 [mm] "Chip Capacitor, Body 1.0x0.5mm, 0402, IPC Medium Density"
  round 0.2 on Mech14: 0(0,0)
  rrect20% 0.6x0.5 smd: 1(-0.5,0) 2(0.5,0)
  Top pour cut-out: -0.2,0.35 0.2,0.35 0.2,-0.35 -0.2,-0.35
  silkscreen extent -1.05,-0.5 1.05,0.5, body extent -0.52,-0.27 0.53,0.28, height 0.55
CAP0402#2 [mm] "Chip Capacitor, Body 1.0x0.5mm, 0402, IPC Medium Density"
  round 0.2 on Mech15: 0(0,0)
  rrect20% 0.6x0.5 smd: 1(-0.5,0) 2(0.5,0)
  Top pour cut-out: -0.2,0.35 0.2,0.35 0.2,-0.35 -0.2,-0.35
  silkscreen extent -1.05,-0.5 1.05,0.5, body extent -0.52,-0.27 0.53,0.28, height 0.55
CAP0402#3 [mm] "Chip Capacitor, Body 1.0x0.5mm, 0402, IPC Medium Density"
  round 0.2 on Mech14: 0(0,0)
  rrect20% 0.6x0.5 smd paste+0: 1(-0.5,0) 2(0.5,0)
  Top pour cut-out: -0.2,0.35 0.2,0.35 0.2,-0.35 -0.2,-0.35
  silkscreen extent -1.05,-0.5 1.05,0.5, body extent -0.52,-0.27 0.53,0.28, height 0.55
CAP0603#1 [mm] "Chip Capacitor, Body 1.6x0.8mm, 0603, IPC Medium Density"
  round 0.254 on Mech14: 0(0,0)
  rrect25% 0.9x1 smd: 1(-0.85,0) 2(0.85,0)
  Top pour cut-out: -0.4,0.6 0.4,0.6 0.4,-0.6 -0.4,-0.6
  silkscreen extent -0.18,-0.48 0.18,0.48, body extent -0.85,-0.45 0.85,0.45, height 0.89
CAP0603#2 [mm] "Chip Capacitor, Body 1.6x0.8mm, 0603, IPC Medium Density"
  round 0.254 on Mech15: 0(0,0)
  rrect25% 0.9x1 smd: 1(-0.85,0) 2(0.85,0)
  Top pour cut-out: -0.4,0.6 0.4,0.6 0.4,-0.6 -0.4,-0.6
  silkscreen extent -0.18,-0.48 0.18,0.48, body extent -0.85,-0.45 0.85,0.45, height 0.89
CRYSTAL_4-LCC [mm] "SMD Crystal 4-lead leadless package"
  round 0.508 on Mech14: 0(0,0)
  rrect25% 1.4x1.2 smd: 1(-1.1,-0.85) 2(1.1,-0.85) 3(1.1,0.85) 4(-1.1,0.85)
  silkscreen extent -2.3,-1.6 2,1.6, body extent -1.65,-1.3 1.65,1.3, height 0.8
ESD7016 [mm]
  rect 0.5x0.23 smd mask+0.04: 1(-0.287,1.4)
  rect 0.4x0.23 smd mask+0.04: 2(-0.337,1) 3(-0.337,0.6) 4(-0.337,0.2) 5(-0.337,-0.2) 6(-0.337,-0.6) 7(-0.337,-1) 8(-0.337,-1.4)
  rect 0.6x0.45 smd mask+0.05: 9(0.337,0.58) 10(0.337,-0.58)
  silkscreen extent -0.56,-1.65 0.69,1.65
ESD8472_X3DFN2#1 [mm]
  rect 0.31x0.3 smd paste-1 mask+0.05: 1(-0.225,0) 2(0.225,0)
  silkscreen extent -0.2,-0.33 0.2,0.33
ESD8472_X3DFN2#2 [mm]
  rect 0.31x0.3 smd mask+0.05: 1(-0.225,0) 2(0.225,0)
  silkscreen extent -0.2,-0.33 0.2,0.33, body extent -0.34,-0.17 0.34,0.18, height 0.33
Fiducial_local [mm]
  round 1 smd paste-1 mask+0.5: 1(0,0)
  Top pour cut-out: -1.05,0 -0.97,-0.402 -0.742,-0.742 -0.402,-0.97 0,-1.05 0,-1.05 0.402,-0.97 0.742,-0.742 0.97,-0.402 1.05,0 1.05,0 0.97,0.402 0.742,0.742 0.402,0.97 0,1.05 0,1.05 -0.402,0.97 -0.742,0.742 -0.97,0.402 -1.05,0
FT601Q [mm] "QFN, 76-Leads, Body 9,05x9,05mm, Pitch 0,40mm, Thermal Pad 5,55x5,55mm, IPC High Density"
  rect 0.9x0.2 smd mask+0.05: 1(-4.5,3.6) 2(-4.5,3.2) 3(-4.5,2.8) 4(-4.5,2.4) 5(-4.5,2) 6(-4.5,1.6) 7(-4.5,1.2) 8(-4.5,0.8) 9(-4.5,0.4) 10(-4.5,0) 11(-4.5,-0.4) 12(-4.5,-0.8) 13(-4.5,-1.2) 14(-4.5,-1.6) 15(-4.5,-2) 16(-4.5,-2.4) 17(-4.5,-2.8) 18(-4.5,-3.2) 19(-4.5,-3.6) 39(4.5,-3.6) 40(4.5,-3.2) 41(4.5,-2.8) 42(4.5,-2.4) 43(4.5,-2) 44(4.5,-1.6) 45(4.5,-1.2) 46(4.5,-0.8) 47(4.5,-0.4) 48(4.5,0) 49(4.5,0.4) 50(4.5,0.8) 51(4.5,1.2) 52(4.5,1.6) 53(4.5,2) 54(4.5,2.4) 55(4.5,2.8) 56(4.5,3.2) 57(4.5,3.6)
  rect 0.2x0.9 smd mask+0.05: 20(-3.6,-4.5) 21(-3.2,-4.5) 22(-2.8,-4.5) 23(-2.4,-4.5) 24(-2,-4.5) 25(-1.6,-4.5) 26(-1.2,-4.5) 27(-0.8,-4.5) 28(-0.4,-4.5) 29(0,-4.5) 30(0.4,-4.5) 31(0.8,-4.5) 32(1.2,-4.5) 33(1.6,-4.5) 34(2,-4.5) 35(2.4,-4.5) 36(2.8,-4.5) 37(3.2,-4.5) 38(3.6,-4.5) 58(3.6,4.5) 59(3.2,4.5) 60(2.8,4.5) 61(2.4,4.5) 62(2,4.5) 63(1.6,4.5) 64(1.2,4.5) 65(0.8,4.5) 66(0.4,4.5) 67(0,4.5) 68(-0.4,4.5) 69(-0.8,4.5) 70(-1.2,4.5) 71(-1.6,4.5) 72(-2,4.5) 73(-2.4,4.5) 74(-2.8,4.5) 75(-3.2,4.5) 76(-3.6,4.5)
  rect 5.55x5.55 smd: 77(0,0)
  silkscreen extent -4.7,-4.7 4.7,4.7, body extent -4.56,-4.56 4.56,4.56, height 1
Header2x1_TH_v2 [mm]
  rrect50% 1.8x1.3 hole 1: 1(-1.271,0)
  oval 1.8x1.3 hole 1: 2(1.271,0)
  silkscreen extent -2.64,-0.8 2.64,0.8
Header5x1_TH_v2 [mm]
  rrect50% 1.8x1.3 hole 1: 1(-5.086,0)
  oval 1.8x1.3 hole 1: 2(-2.543,0) 3(0,0) 4(2.543,0) 5(5.086,0)
  silkscreen extent -6.46,-0.8 6.46,0.8
HEADER7X1_TH_V2 [mm]
  rrect50% 1.8x1.3 hole 1: 1(-7.629,0)
  oval 1.8x1.3 hole 1: 2(-5.086,0) 3(-2.543,0) 4(0,0) 5(2.543,0) 6(5.086,0) 7(7.629,0)
  silkscreen extent -9,-0.8 9,0.8
HWSON8_LM75 [mm]
  rect 0.625x0.25 smd paste-1: 1(-1.4,0.75) 2(-1.4,0.25) 3(-1.4,-0.25) 4(-1.4,-0.75) 5(1.4,-0.75) 6(1.4,-0.25) 7(1.4,0.25) 8(1.4,0.75)
  rect 1.6x1.6 smd paste-1: 9(0,0)
  silkscreen extent -1.9,-1.63 1.9,1.6, body extent -1.51,-1.5 1.51,1.5, height 0.8
LD39100PUR [mm]
  rect 0.5x0.7 smd mask+0.05: 1(-0.95,-1.4) 2(0,-1.4) 3(0.95,-1.4) 4(0.95,1.4) 5(0,1.4) 6(-0.95,1.4)
  rect 2.5x1.7 smd mask+0.05: PAD(0,0)
  silkscreen extent -1.6,-1.6 1.6,1.6, body extent -1.5,-1.55 1.5,1.55, height 0.8
LED-2x0603 [mm]
  round 0.254 on Mech15: 0(0,0)
  rrect25% 0.7x0.4 smd: 1(-0.775,0.325) 2(-0.775,-0.375) 3(0.625,0.325) 4(0.625,-0.375)
  Top pour cut-out: -0.5,0.5 0.5,0.5 0.5,-0.5 -0.5,-0.5
  silkscreen extent -1.55,-0.95 1.68,0.9, body extent -0.8,-0.42 0.8,0.38, height 0.75